# EAGLE board Hifi Nutube DAC (EAGLE 9.6.2)
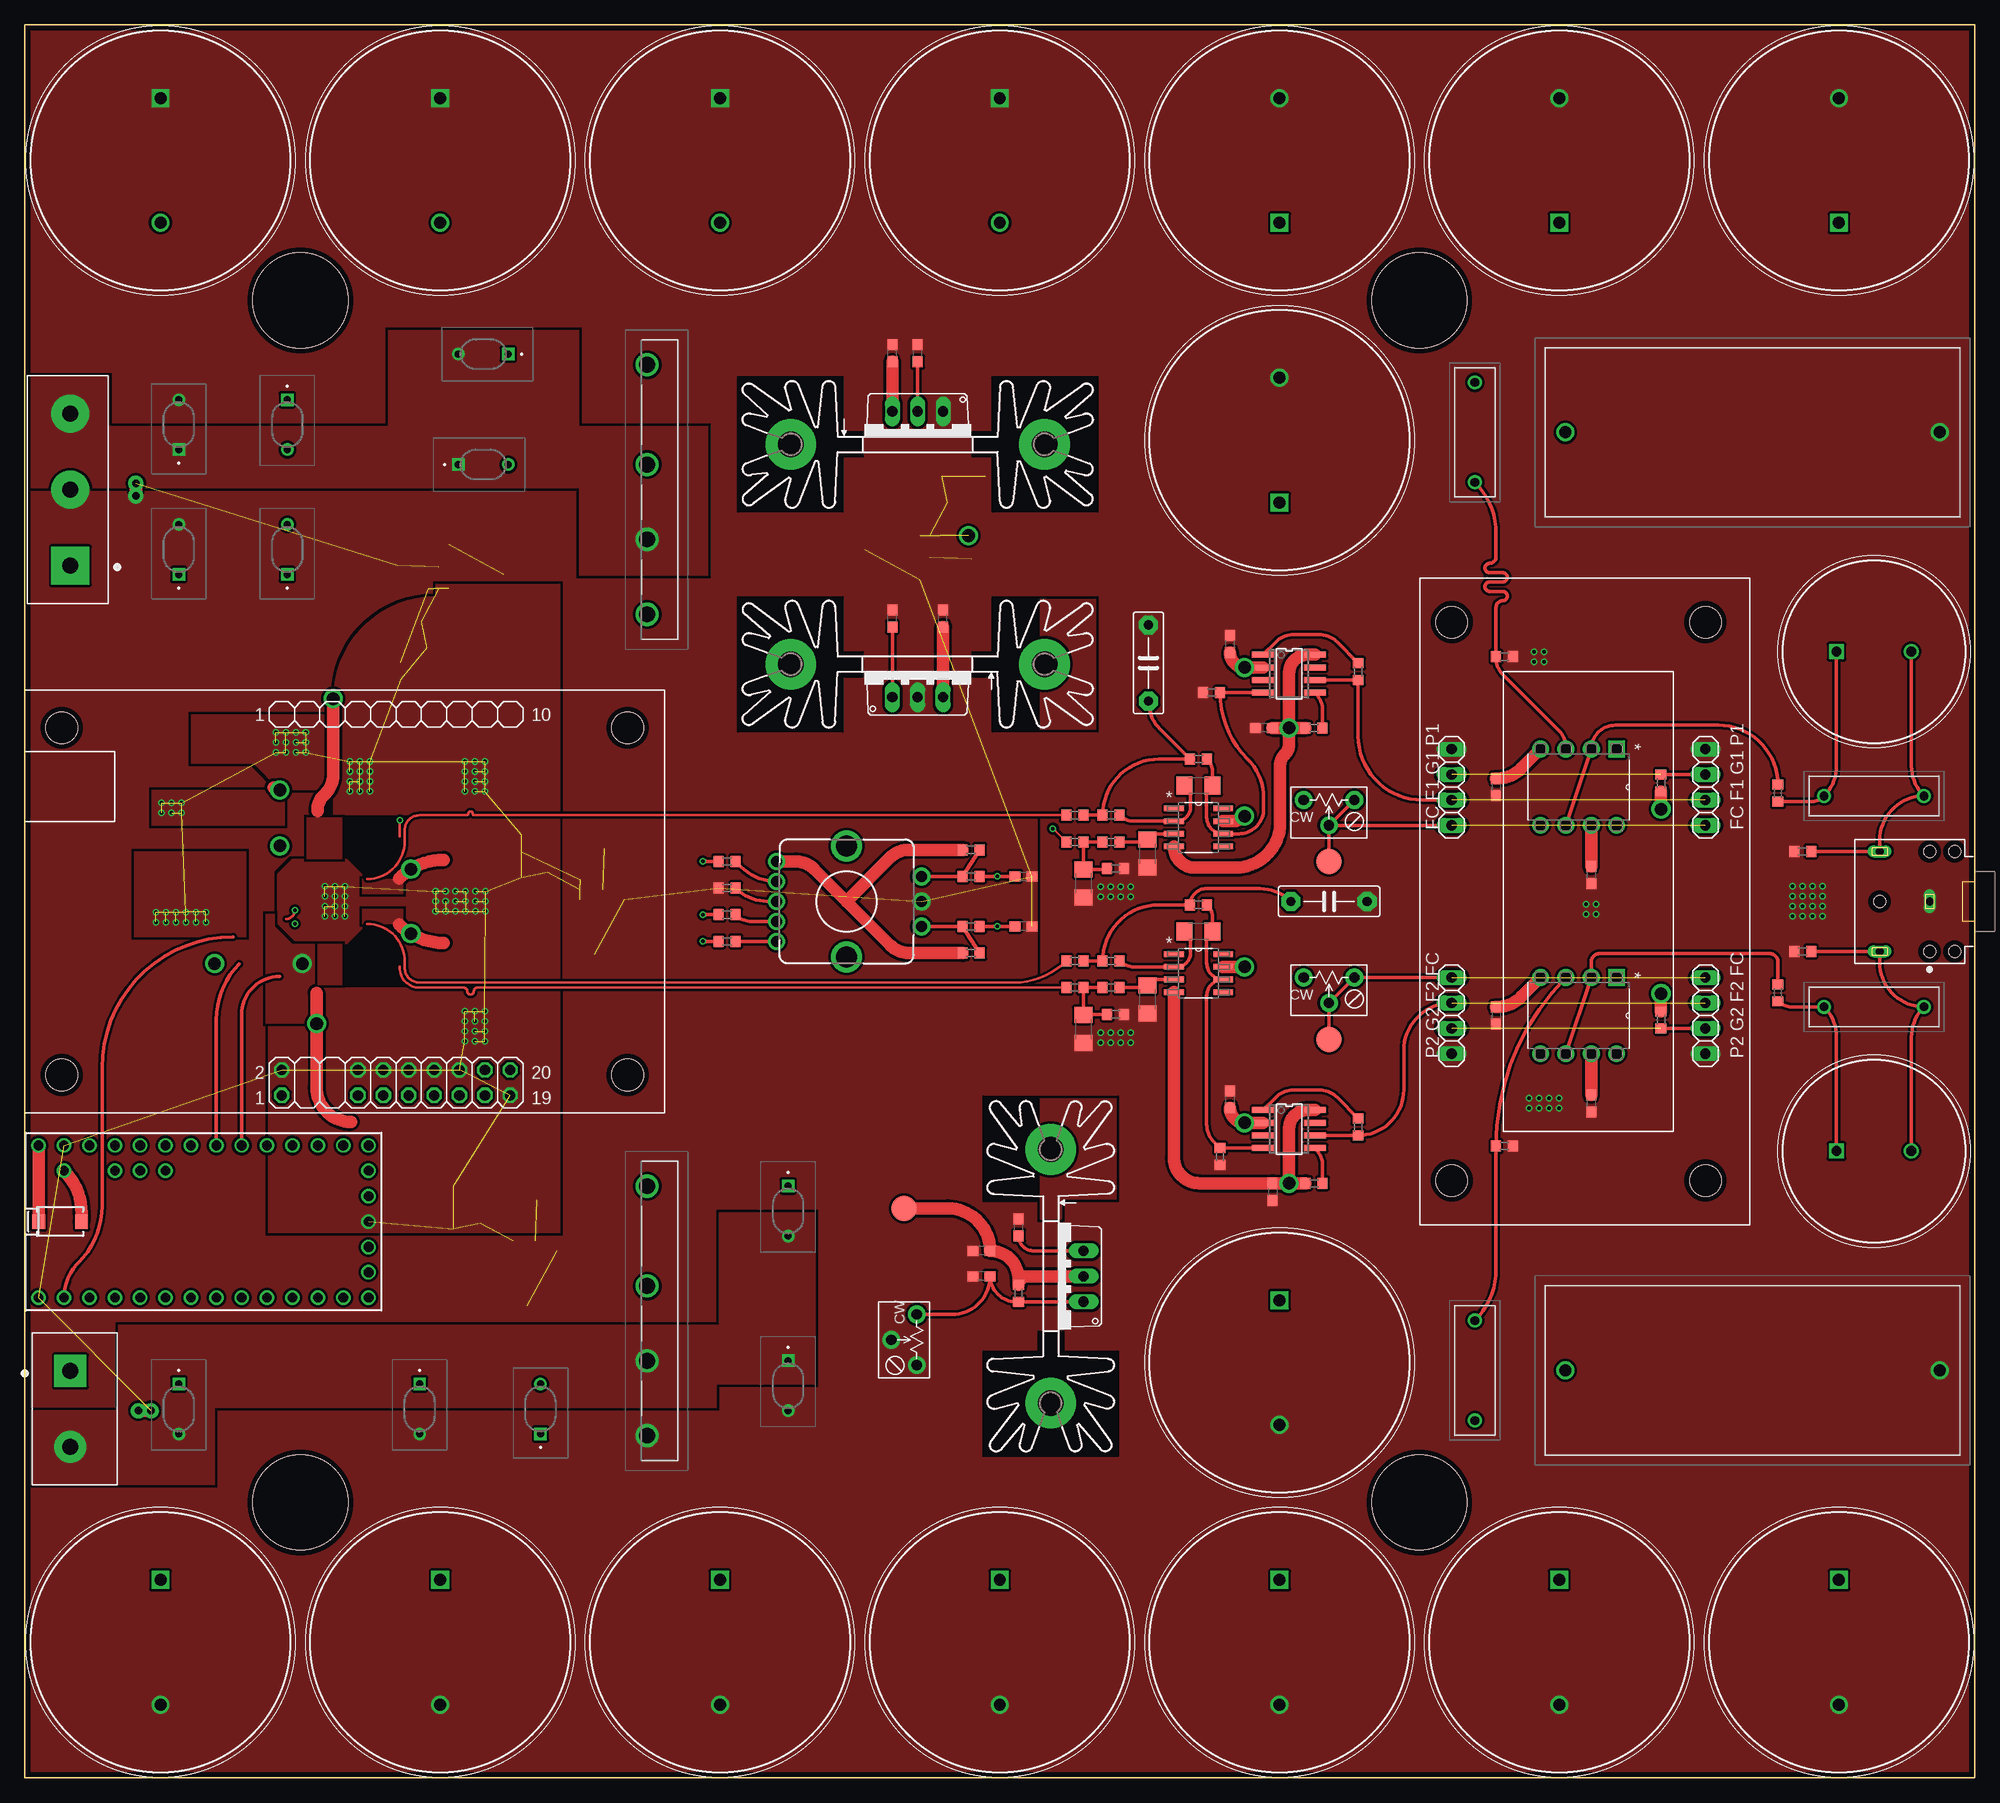
[diagram p0: board, top side]
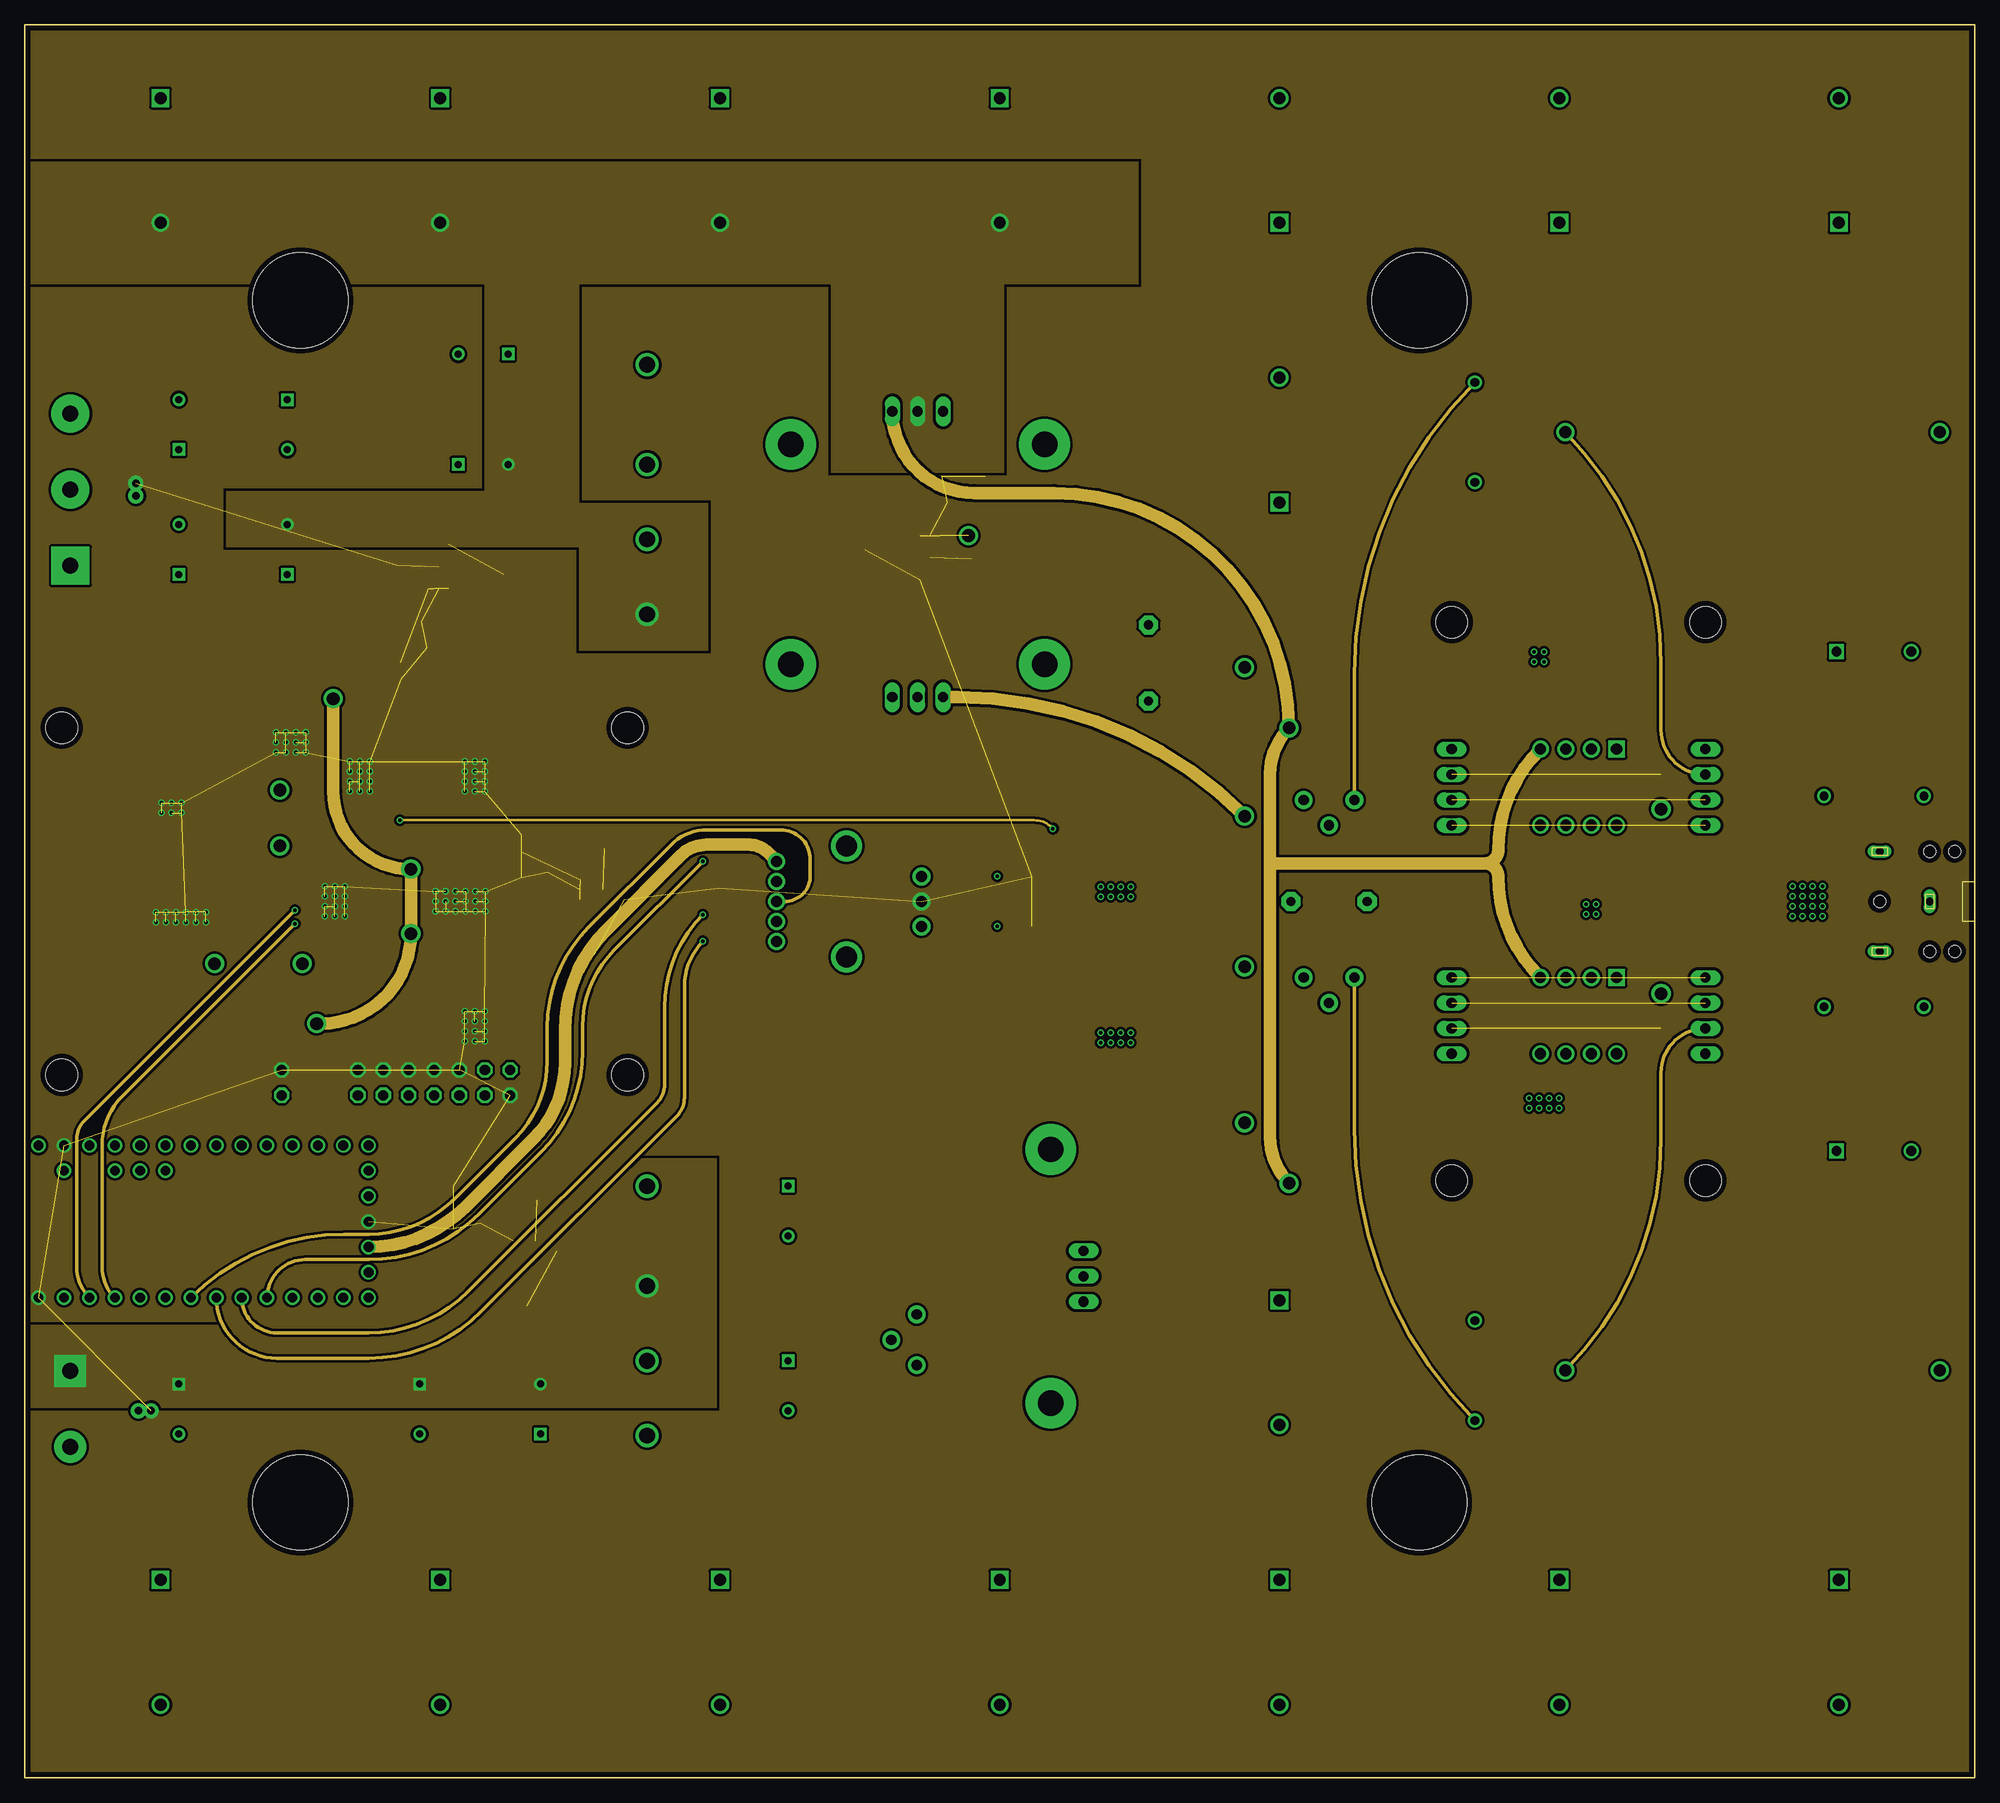
[diagram p1: board, inner layer Route2]
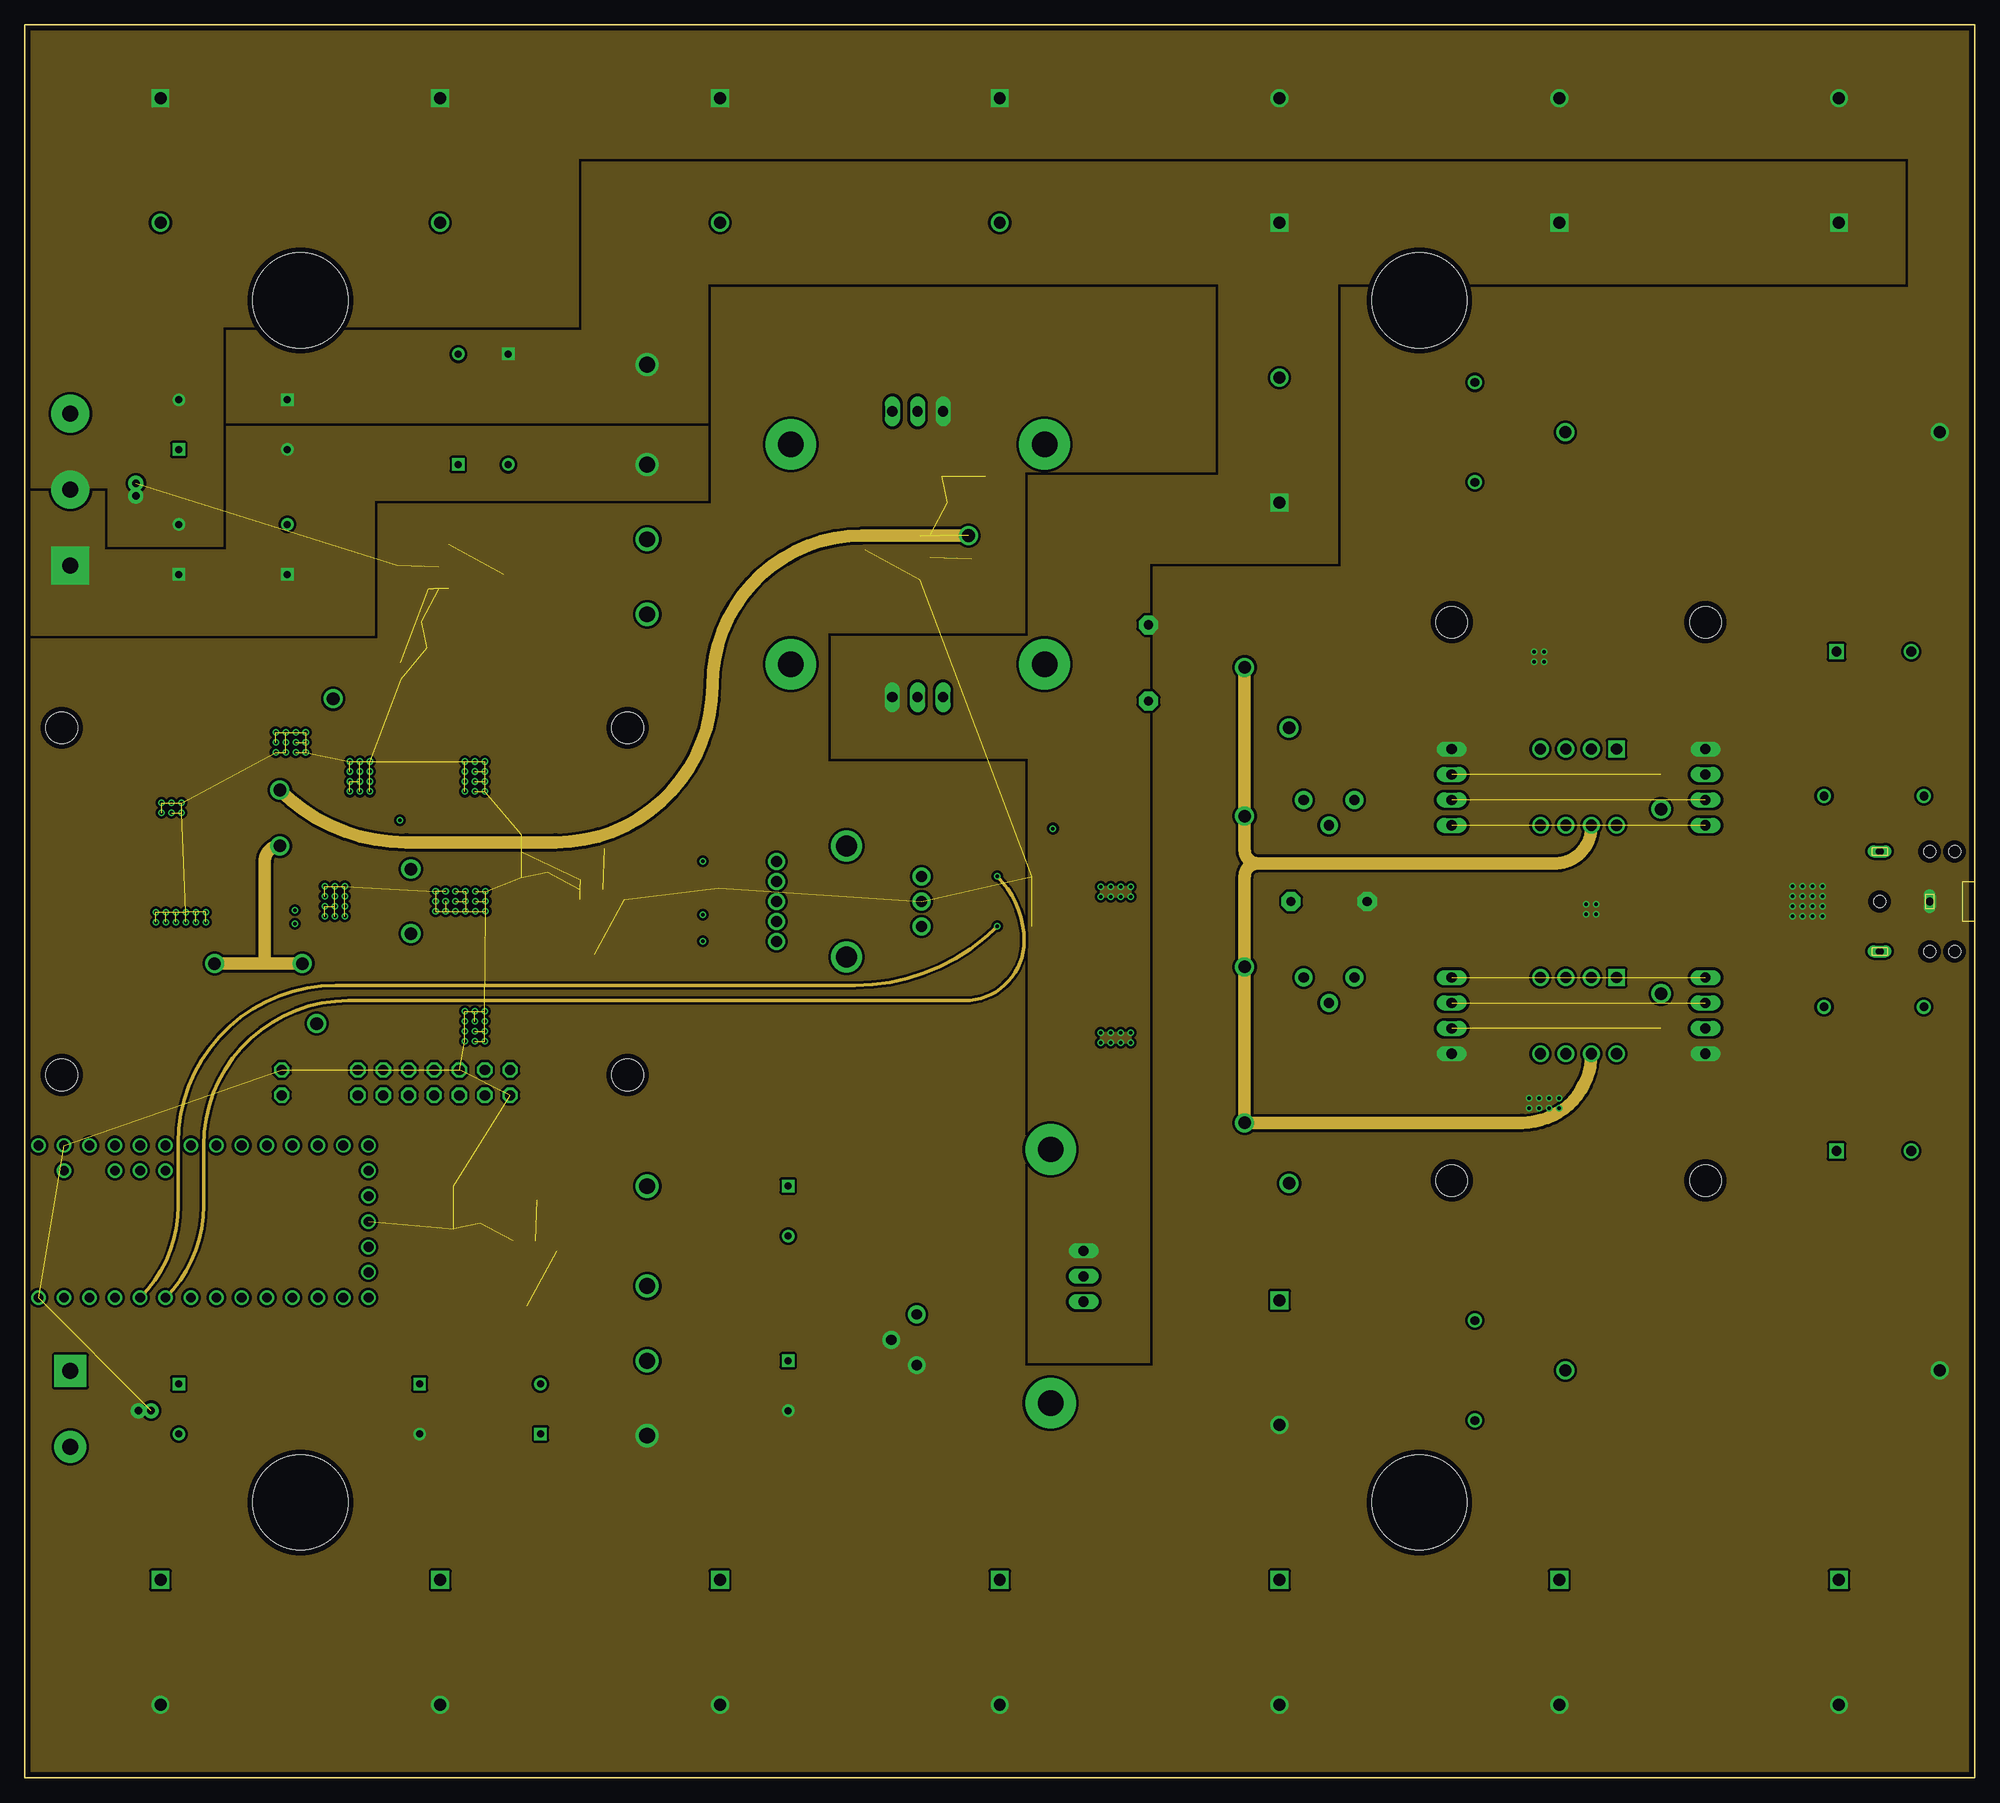
[diagram p2: board, inner layer Route15]
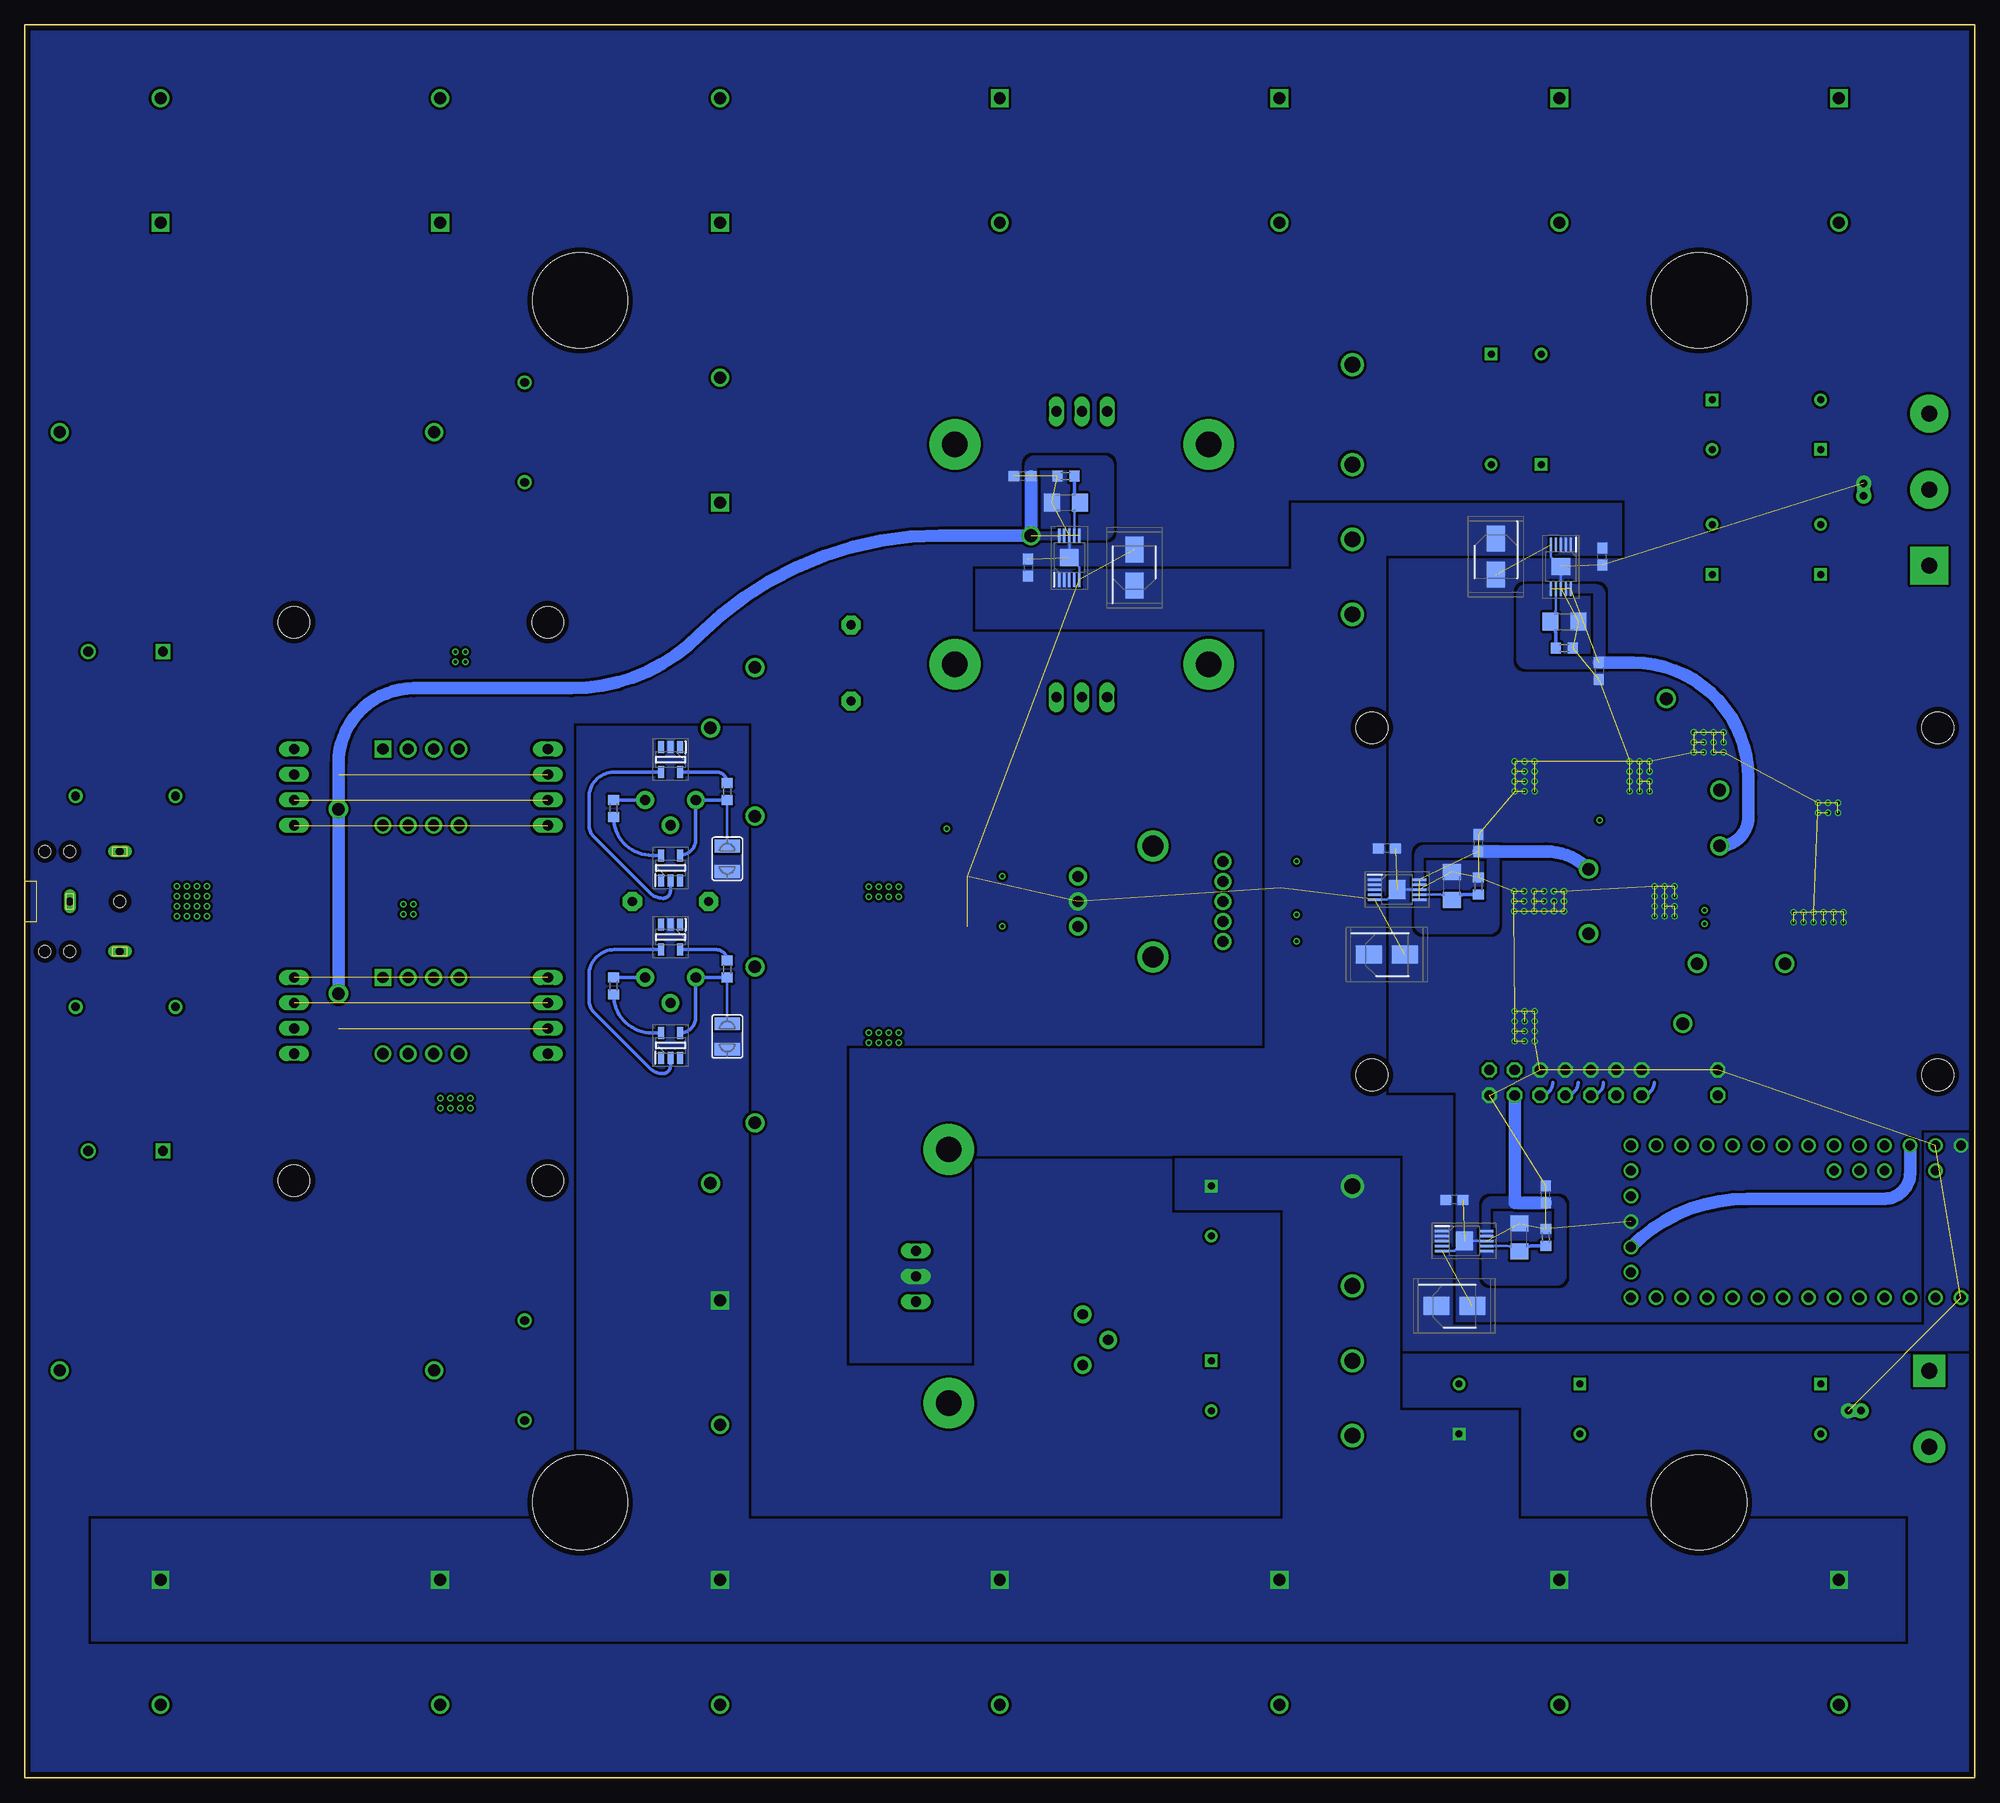
[diagram p3: board, bottom side, seen from below]

Size 195.12 x 175.44 mm. Coordinates in mm from the lower left corner, seen from the top.
Outline: 0,175.44 0,0 195.12,0 195.12,175.44 0,175.44
Copper layers (1*2*15*16): Top 0.035mm / dielectric 0.2mm / Route2 0.035mm / dielectric 1.2mm / Route15 0.035mm / dielectric 0.2mm / Bottom 0.035mm
Design rules "Elecrow_4-layer_PCB_eagle_rule": minimum track width 6mil, minimum drill 12mil, track to track 6mil, track to pad 6mil, pad to pad 6mil, via to via 8mil, smd to smd 0mil, copper to edge 20mil, drill to drill 10mil, minimum pad ring 6mil, minimum via ring 6mil, stop-mask expansion 0mil, vias tented up to drill 100mil, thermal gap 10mil
Net classes: 0 default: width 0.246 mm, drill 0.246 mm, clearance 0.254 mm; 1 diff pairs: width 0.246 mm, drill 0.246 mm, clearance 0.254 mm; 3 Power: width 1.27 mm, drill 1.27 mm, clearance 0.254 mm
Holes 9.53 mm at 27.56,147.88 27.56,27.56 139.56,27.56 139.56,147.88

## Footprints (pad centres in the part's own frame; a part is rotated, then mirrored left to right if it is on the bottom)
GSIB-5S = drill 1.56 pad 2.34: 1 0,0; 2 10,0; 3 17.5,0; 4 25,0
C0603 = smd 1.1 x 1: 1 -0.85,0; 2 0.85,0
CAPAE430X550N = smd 2.6 x 1.8: 1 -1.8,0; 2 1.8,0
FG24 = drill 0.7 pad 1.25 square: 1 0,0 | drill 0.7 pad 1.25: 2 5,0
C1206 = smd 1.6 x 1.8: 1 -1.4,0; 2 1.4,0
CAPPRD1250W100D2600H5200 = drill 1.2 pad 1.8 square: 1 0,0 | drill 1.2 pad 1.8: 2 12.5,0
MKP4D031003C00JSSD = drill 0.86 pad 1.397: 1 0,0; 2 10,0
C7.5B3 = drill 0.914 pad 1.905 octagon: 1 -3.81,0; 2 3.81,0
MKP4D051007E00JSSD = drill 1.2 pad 1.8: 1 0,0; 2 37.5,0
CAPPRD750W80D1825H4150 = drill 1 pad 1.5 square: 1 0,0 | drill 1 pad 1.5: 2 7.5,0
SMA-DIODE = smd 1.27 x 1.47: A -2.15,0; C 2.15,0
I2SOVERUSBV3 = drill 1.016 octagon: H3.1 25.703,1.745; H3.2 25.703,4.285; H3.7 33.322,1.745; H3.8 33.322,4.285; H3.9 35.862,1.745; H3.10 35.862,4.285; H3.11 38.403,1.745; H3.12 38.403,4.285; H3.13 40.943,1.745; H3.14 40.943,4.285; H3.15 43.483,1.745; H3.16 43.483,4.285; H3.17 46.023,1.745; H3.18 46.023,4.285; H3.19 48.562,1.745; H3.20 48.562,4.285 | hole 3.175: 3.688,3.775; 3.688,38.525; 60.312,38.525; 60.312,3.775
TO220V = drill 1.016 long: 1 -2.54,-2.54; 2 0,-2.54; 3 2.54,-2.54
SOP50P490X110-11N = smd 1.425 x 0.246: 1 -2.212,1; 2 -2.212,0.5; 3 -2.212,0; 4 -2.212,-0.5; 5 -2.212,-1; 6 2.212,-1; 7 2.212,-0.5; 8 2.212,0; 9 2.212,0.5; 10 2.212,1 | smd 1.68 x 1.88: 11 0,0
TERMINALBLOCK_PLUGGABLE-3-7.62MM = drill 1.6 pad 3.81 square: 1 -7.62,0 | drill 1.6 pad 3.81: 2 0,0; 3 7.62,0
TERMINALBLOCK_PLUGGABLE-2-7.62MM = drill 1.6 pad 3.2 square: 1 -3.81,0 | drill 1.6 pad 3.2: 2 3.81,0
531XXXXXXXX = drill 2.54 pad 5.08: A2,5 -12.7,-0.762; B2,5 12.7,-0.762
SOT95P280X145-5N = smd 1.2 x 0.6: 1 -1.25,0.95; 2 -1.25,0; 3 -1.25,-0.95; 4 1.25,-0.95; 5 1.25,0.95
SO8 = smd 0.6 x 2.2: 1 -1.905,-2.6; 2 -0.635,-2.6; 3 0.635,-2.6; 4 1.905,-2.6; 5 1.905,2.6; 6 0.635,2.6; 7 -0.635,2.6; 8 -1.905,2.6
R0603 = smd 1 x 1.1: 1 -0.85,0; 2 0.85,0
TRIMPOT_3266 = drill 1.016 pad 1.778: 1 -2.54,-1.27; 2 0,1.27; 3 2.54,-1.27
SHORT_ALL-50 = drill 0.737 pad 1.524: 1 -0.635,0; 2 0.635,0
SJW = smd 1.27 x 2.54: 1 -1.27,0; 2 1.27,0
ENCODER_LED_3_KIT = drill 1.1 pad 1.676: 1 -4,7; 2 -2,7; 3 0,7; 4 2,7; 5 4,7 | drill 1.1 pad 1.8: A -2.5,-7.5; B 2.5,-7.5; C 0,-7.5 | drill 2.1: M1 -5.55,0; M2 5.55,0
B2,54 = smd 2.54 x 2.54: TP 0,0
DIP254P762X508-8 = drill 1.118 square: 1 -7.62,7.62 | drill 1.118: 2 -7.62,5.08; 3 -7.62,2.54; 4 -7.62,0; 5 0,0; 6 0,2.54; 7 0,5.08; 8 0,7.62
SOIC127P600X175-8N = smd 1.981 x 0.559: 1 -2.464,1.905; 2 -2.464,0.635; 3 -2.464,-0.635; 4 -2.464,-1.905; 5 2.464,-1.905; 6 2.464,-0.635; 7 2.464,0.635; 8 2.464,1.905
TEENSY_3.0-3.2&LC_ALL_PINS = drill 0.965: 0 -7.62,13.97; 1 -7.62,11.43; 2 -7.62,8.89; 3 -7.62,6.35; 3.3V 7.62,11.43; 3.3V1 -2.54,-16.51; 4 -7.62,3.81; 5 -7.62,1.27; 6 -7.62,-1.27; 7 -7.62,-3.81; 8 -7.62,-6.35; 9 -7.62,-8.89; 10 -7.62,-11.43; 11 -7.62,-13.97; 12 -7.62,-16.51; 13 7.62,-16.51; 14/A0 7.62,-13.97; 15/A1 7.62,-11.43; 16/A2 7.62,-8.89; 17/A3 7.62,-6.35; 18/A4 7.62,-3.81; 19/A5 7.62,-1.27; 20/A6 7.62,1.27; 21/A7 7.62,3.81; 22/A8 7.62,6.35; 23/A9 7.62,8.89; A10 5.08,6.35; A11 5.08,3.81; AGND 7.62,13.97; AREF 5.08,8.89; GND -7.62,16.51; GND1 0,-16.51; PGM 2.54,-16.51; RESET/DAC 5.08,-16.51; VBAT -5.08,-16.51; VIN 7.62,16.51; VUSB 5.08,13.97
CUI_SJ1-3523N = drill 0.8 long: 1 0,0; 2 5,-5; 3 5,5 | hole 1.2: -2.5,5; 0,5; 5,0; -2.5,-5; 0,-5
NUTUBE_CARRIER = drill 1.016 long: 3 -15.24,25.4; 5 -12.7,25.4; 6 -10.16,25.4; 11 -7.62,25.4; 12 7.62,25.4; 13 10.16,25.4; 15 12.7,25.4; 18 15.24,25.4; 19 -15.24,0; 20 -12.7,0; 21 -10.16,0; 22 -7.62,0; 23 7.62,0; 24 10.16,0; 25 12.7,0; 26 15.24,0 | hole 3.175: -27.94,0; -27.94,25.4; 27.94,25.4; 27.94,0

## Placement (x,y rotation side)
BR1  GSIB2560-E3/45  [GSIB-5S]  62.27,141.44 270 top
BR2  GSIB2560-E3/45  [GSIB-5S]  62.27,59.23 270 top
C14  4.7uF, 35V, X5R or X7R  [C0603]  37.58,110.78 270 bottom
C15  0.1uF, 35V  [C0603]  37.27,122.22 90 bottom
C16  EEE-1VA100WR  [CAPAE430X550N]  47.91,122.22 270 bottom
C17  FG24X7T2E104KNT00  [FG24]  26.25,137.94 270 top
C18  22uF, 35V  [C1206]  41.05,115.73 0 bottom
C19  FG24X7T2E104KNT00  [FG24]  51.59,34.42 90 top
C20  [FG24]  15.4,39.42 270 top
C21  FG24X7T2E104KNT00  [FG24]  26.25,120.44 90 top
C22  FG24X7T2E104KNT00  [FG24]  48.37,142.5 180 top
C23  FG24X7T2E104KNT00  [FG24]  43.37,131.44 0 top
C24  UVY2A332MRD  [CAPPRD1250W100D2600H5200]  125.56,19.81 270 top
C25  FG24X7T2E104KNT00  [FG24]  39.5,39.42 270 top
C26  FG24X7T2E104KNT00  [FG24]  76.39,59.23 270 top
C27  FG24X7T2E104KNT00  [FG24]  76.39,41.73 270 top
C28  UVY2A332MRD  [CAPPRD1250W100D2600H5200]  181.56,19.81 270 top
C29  UVY2A332MRD  [CAPPRD1250W100D2600H5200]  153.56,19.81 270 top
C30  UVY2A332MRD  [CAPPRD1250W100D2600H5200]  125.56,47.81 270 top
C31  UVY2A332MRD  [CAPPRD1250W100D2600H5200]  13.56,168.13 270 top
C32  0.1uF, 35V  [C0603]  147.24,76.29 270 top
C33  [FG24]  15.4,132.94 90 top
C36  UVY2A332MRD  [CAPPRD1250W100D2600H5200]  125.56,155.63 90 top
C37  UVY2A332MRD  [CAPPRD1250W100D2600H5200]  41.56,19.81 270 top
C38*  0.1uF*, 63V  [MKP4D031003C00JSSD]  180.06,98.27 0 top
C39  UVY2A332MRD  [CAPPRD1250W100D2600H5200]  69.56,168.13 270 top
C40  UVY2A332MRD  [CAPPRD1250W100D2600H5200]  41.56,168.13 270 top
C41  UVY2A332MRD  [CAPPRD1250W100D2600H5200]  97.56,168.13 270 top
C42  UVY2A332MRD  [CAPPRD1250W100D2600H5200]  153.56,155.63 90 top
C43  UVY2A332MRD  [CAPPRD1250W100D2600H5200]  125.56,127.63 90 top
C44  UVY2A332MRD  [CAPPRD1250W100D2600H5200]  181.56,155.63 90 top
C45*  4.7nF, 63V*  [C1206]  112.32,77.92 270 top
C46*  0.033uF, 63V*  [C1206]  105.92,74.94 270 top
C48  0.1uF, 35V  [C0603]  120.61,113.45 90 top
C50  0.1uF, 35V  [C0603]  124.02,105.09 180 top
C51*  0.01uF, 63V*  [C7.5B3]  130.52,87.72 0 top
C52*  1500pF, 63V*  [C1206]  117.46,84.71 180 top
C53  [FG24]  15.4,120.44 90 top
C54*  4.7nF, 63V*  [C1206]  112.32,92.5 270 top
C55*  0.033uF, 63V*  [C1206]  105.92,89.52 270 top
C56*  1500pF, 63V*  [C1206]  117.46,99.3 180 top
C57  0.1uF, 35V  [C0603]  147.24,99.15 270 top
C58*  0.01uF, 63V*  [C7.5B3]  112.44,111.59 90 top
C59*  0.1uF*, 63V  [MKP4D031003C00JSSD]  180.06,77.17 0 top
C60  UVY2A332MRD  [CAPPRD1250W100D2600H5200]  13.56,19.81 270 top
C61  UVY2A332MRD  [CAPPRD1250W100D2600H5200]  69.56,19.81 270 top
C62  UVY2A332MRD  [CAPPRD1250W100D2600H5200]  97.56,19.81 270 top
C63  0.33uF, 35V  [C0603]  86.81,116.05 90 top
C64  0.1uF, 35V  [C0603]  156.76,90.38 270 top
C65  0.1uF, 35V  [C0603]  120.61,67.88 90 top
C66  1.0uF, 35V  [C0603]  91.89,116.05 90 top
C67  0.1uF, 35V  [C0603]  124.87,58.66 270 top
C68*  10uF*  [MKP4D051007E00JSSD]  154.16,134.67 0 top
C69  0.1uF, 35V  [C0603]  156.76,67.52 270 top
C70*  10uF*  [MKP4D051007E00JSSD]  154.16,40.77 0 top
C71  0.33uF, 35V  [C0603]  89.34,142.58 90 top
C72  1.0uF, 35V  [C0603]  86.81,142.58 90 top
C73  4.7uF, 35V, X5R or X7R  [C0603]  95.28,130.28 180 bottom
C74  0.1uF, 35V  [C0603]  94.73,121.13 270 bottom
C75  22uF, 35V  [C1206]  90.95,127.62 180 bottom
C76  EEE-1VA100WR  [CAPAE430X550N]  84.09,121.13 90 bottom
C77  4.7uF, 35V, X5R or X7R  [C0603]  49.64,93.58 90 bottom
C78  0.1uF, 35V  [C0603]  58.8,93.03 180 bottom
C79  22uF, 35V  [C1206]  52.3,89.25 90 bottom
C80  EEE-1VA100WR  [CAPAE430X550N]  58.8,82.4 0 bottom
C83  0.01uF (10nF)  [C0603]  99.95,85.22 180 top
C84  0.01uF (10nF)  [C0603]  99.95,90.22 0 top
C85  0.1uF, 35V  [C0603]  99.44,55.1 90 top
C86  1.0uF, 35V, Tantalum  [C0603]  95.75,52.75 180 top
C87  10uF, 35V  [C0603]  95.75,50.2 180 top
C88  4.7uF, 35V, X5R or X7R  [C0603]  42.9,58.41 90 bottom
C89  0.1uF, 35V  [C0603]  52.06,57.87 180 bottom
C90  22uF, 35V  [C1206]  45.57,54.09 90 bottom
C91  EEE-1VA100WR  [CAPAE430X550N]  52.06,47.23 0 bottom
C92*  0.1uF*, 63V  [MKP4D031003C00JSSD]  145.11,35.77 90 top
C93*  0.1uF*, 63V  [MKP4D031003C00JSSD]  145.11,139.67 270 top
C94*  UKZ1H102MHM  [CAPPRD750W80D1825H4150]  181.31,62.73 0 top
C95*  UKZ1H102MHM  [CAPPRD750W80D1825H4150]  181.31,112.71 0 top
D1  SS14-DIODE-SCHOTTKY-SS14  [SMA-DIODE]  3.52,55.67 180 top
I2SOVERUSB  I2SOVERUSBV3  [I2SOVERUSBV3]  0,66.57 0 top
IC1  78TV  [TO220V]  89.34,110.7 0 top
IC2  LT3042EMSE#PBF  [SOP50P490X110-11N]  90.6,122.13 90 bottom
IC3  LT3042EMSE#PBF  [SOP50P490X110-11N]  41.4,121.22 270 bottom
IC4  7918TV  [TO220V]  89.34,134.23 180 top
IC5  LT3042EMSE#PBF  [SOP50P490X110-11N]  57.8,88.9 0 bottom
IC6  LM317T  [TO220V]  103.42,50.2 90 top
IC7  LT3042EMSE#PBF  [SOP50P490X110-11N]  51.06,53.73 0 bottom
JP1  15VAC  [TERMINALBLOCK_PLUGGABLE-3-7.62MM]  4.55,128.94 90 top
JP2  +56VAC  [TERMINALBLOCK_PLUGGABLE-2-7.62MM]  4.55,36.92 270 top
KK1  TO-220/218-531XXXXXXXX  [531XXXXXXXX]  103.42,50.2 270 top
KK2  TO-220/218-531XXXXXXXX  [531XXXXXXXX]  89.34,110.7 180 top
KK3  TO-220/218-531XXXXXXXX  [531XXXXXXXX]  89.34,134.23 0 top
Q1  DN1509K1-G  [SOT95P280X145-5N]  130.52,101.92 270 bottom
Q2  DN1509K1-G  [SOT95P280X145-5N]  130.52,91.08 90 bottom
Q3  LSK389B_SO  [SO8]  126.52,110.51 270 top
Q4  DN1509K1-G  [SOT95P280X145-5N]  130.52,84.14 270 bottom
Q5  DN1509K1-G  [SOT95P280X145-5N]  130.52,73.3 90 bottom
Q6  LSK389B_SO  [SO8]  126.52,64.93 270 top
R1  10  [R0603]  70.27,83.72 180 top
R2  10  [R0603]  70.27,86.39 180 top
R3  10  [R0603]  70.27,91.72 180 top
R4  10k  [R0603]  70.27,89.05 180 top
R5  10k  [R0603]  94.69,82.55 0 top
R6  33.2k, 1%  [R0603]  90.95,130.28 180 bottom
R7  49.9k, 1%  [R0603]  49.64,89.25 90 bottom
R8  33.2k, 1%  [R0603]  41.05,113.07 0 bottom
R9  240, 1%  [R0603]  99.44,48.5 270 top
R11  49.9k, 1%  [R0603]  42.9,54.09 90 bottom
R12  800 (Var)  [TRIMPOT_3266]  87.98,43.85 90 top
R13*  1k*  [R0603]  177.92,92.72 0 top
R14*  1k*  [R0603]  177.92,82.72 0 top
R18  1M*  [R0603]  148.09,112.2 0 top
R19  1M* (Var)  [TRIMPOT_3266]  130.52,96.61 180 top
R20  1M* (Var)  [TRIMPOT_3266]  130.52,78.83 180 top
R21  100*  [R0603]  124.83,98.73 90 bottom
R22  1M*  [R0603]  148.09,63.24 180 top
R23  100*  [R0603]  136.21,97.03 270 bottom
R24  100*  [R0603]  124.83,80.95 90 bottom
R25  100*  [R0603]  136.21,79.25 270 bottom
R29  10k  [R0603]  94.69,92.89 0 top
R30  10k  [R0603]  94.69,85.22 180 top
R31  10k  [R0603]  94.69,90.22 180 top
R32*  1*  [R0603]  175.44,78.58 270 top
R33*  1*  [R0603]  175.44,98.56 270 top
R34*  300*  [R0603]  109.16,76.43 180 top
R35*  300*  [R0603]  105.07,79.09 0 top
R36*  91*  [R0603]  108.71,81.76 180 top
R37*  910*  [R0603]  117.46,87.38 180 top
R38*  300*  [R0603]  109.16,91.01 180 top
R39  1M*  [R0603]  118.76,108.6 0 top
R40  1M*  [R0603]  119.61,62.18 90 top
R42  100*  [R0603]  133.43,65.15 90 top
R43  100*  [R0603]  129.02,59.51 0 top
R44  150*  [R0603]  163.75,99.57 270 top
R45  150*  [R0603]  163.75,75.87 270 top
R46*  910*  [R0603]  105.07,81.76 180 top
R47*  27*  [R0603]  108.71,93.68 180 top
R48  100*  [R0603]  133.43,110.72 90 top
R49  100*  [R0603]  129.02,105.09 0 top
R50*  91*  [R0603]  108.71,96.35 180 top
R51*  910*  [R0603]  117.46,101.97 180 top
R52*  910*  [R0603]  105.07,96.35 180 top
R53*  300*  [R0603]  105.07,93.68 0 top
R54*  27*  [R0603]  108.71,79.09 180 top
SH1  SHORTA5  [SHORT_ALL-50]  11.99,36.74 0 top
SH2  SHORTA5  [SHORT_ALL-50]  11.1,128.94 90 top
SJ1  SJW  [SJW]  124.83,91.98 270 bottom
SJ2  SJW  [SJW]  124.83,74.2 270 bottom
SW1  ENCODER_RGB_CAKIT  [ENCODER_LED_3_KIT]  82.23,87.72 90 top
TP1  2.54MM_TESTPOINTB2,54  [B2,54]  130.52,91.69 90 top
TP2  2.54MM_TESTPOINTB2,54  [B2,54]  130.52,73.91 90 top
TP4  2.54MM_TESTPOINTB2,54  [B2,54]  87.98,57 0 top
U2  OPA604AP  [DIP254P762X508-8]  151.68,95.34 270 top
U3  OPA604AP  [DIP254P762X508-8]  151.68,72.48 270 top
U4  OPA1611AID  [SOIC127P600X175-8N]  117.46,80.54 0 top
U5  OPA1611AID  [SOIC127P600X175-8N]  117.46,95.12 0 top
U$1  TEENSY_LC_ALL_PINS  [TEENSY_3.0-3.2&LC_ALL_PINS]  17.88,55.67 90 top
U$2  SJ1-3523N  [CUI_SJ1-3523N]  190.62,87.72 180 top
VT1  NUTUBE_CARRIER  [NUTUBE_CARRIER]  142.79,87.72 270 top

## Library data of the parts
BR1 BR2 = Hifi Nutube DAC (Next 6) 28; BOM: Yes; DESCRIPTION: VISHAY - GSIB2560-E3/45 - BRIDGE RECTIFIER, SINGLE PHASE, 3.5A, 600V, GSIB-5S; DISTRIBUTOR_PART_NUMBER: 625-GSIB2560-E3; HEIGHT: 30mm; LINK: https://www.mouser.com/ProductDetail/625-GSIB2560-E3; MANUFACTURER_NAME: Vishay; MANUFACTURER_PART_NUMBER: GSIB2560-E3/45
C14 C73 C77 C88 = Hifi Nutube DAC (Next 6) 28; BOM: Yes; DESCRIPTION: Multilayer Ceramic Capacitors MLCC - SMD/SMT 0603 4.7uF 35volts X5R 10%; DISTRIBUTOR_PART_NUMBER: 81-GRM188R6YA475KE5D; HEIGHT: 0.8mm; LINK: https://www.mouser.com/ProductDetail/Murata-Electronics/GRM188R6YA475KE15D?qs=eeBpzGFlv%252B%2FTEUAkSXFIlg%3D%3D; MANUFACTURER_NAME: Murata Electronics; MANUFACTURER_PART_NUMBER: GRM188R6YA475KE15D
C15 C32 C48 C50 C57 C64 C65 C67 C69 C74 C78 C85 C89 = Hifi Nutube DAC (Next 6) 28; BOM: Yes; DESCRIPTION: Multilayer Ceramic Capacitors MLCC - SMD/SMT 0603 35VDC 0.1uF 20% X7R AEC-Q200; DISTRIBUTOR_PART_NUMBER: 963-GMJ107BB7104MAHT; HEIGHT: 1mm; LINK: https://www.mouser.com/ProductDetail/Taiyo-Yuden/GMJ107BB7104MAHT?qs=%2Fha2pyFadujHrlowQtTjdnqfzoSa0Cvv97OkvRNS3sSjPFq524h2H2kGErSK5VOC; MANUFACTURER_NAME: Taiyo Yuden; MANUFACTURER_PART_NUMBER: GMJ107BB7104MAHT
C16 C76 C80 C91 = Hifi Nutube DAC (Next 6) 28; BOM: Yes; DESCRIPTION: Panasonic Aluminium Electrolytic Capacitor 10uF 35V dc 4mm B S(V) Series, Surface Mount Electrolytic, +/-20% 4 x 5.4mm; DISTRIBUTOR_PART_NUMBER: 667-EEE-1VA100WR; HEIGHT: 5.5mm; LINK: https://www.mouser.com/ProductDetail/Panasonic/EEE-1VA100WR?qs=%2Fha2pyFadug8Pl57h5%252BWRycqoj%252BYk%252BwXx38E6gXpvvRzpPae9dJ6UQ%3D%3D; MANUFACTURER_NAME: Panasonic; MANUFACTURER_PART_NUMBER: EEE-1VA100WR
C17 C19 C21-C23 C25-C27 = Hifi Nutube DAC (Next 6) 28; BOM: Yes; DESCRIPTION: MLCC with dipped radial lead; HEIGHT: 5.5mm; MANUFACTURER_NAME: TDK; MANUFACTURER_PART_NUMBER: FG24X7T2E104KNT00
C18 C75 C79 C90 = Hifi Nutube DAC (Next 6) 28; BOM: Yes; DESCRIPTION: Multilayer Ceramic Capacitors MLCC - SMD/SMT 1210 35VDC 22uF 20% X5R; DISTRIBUTOR_PART_NUMBER: 963-GMK325BJ226MM-P; HEIGHT: 2.7mm; LINK: https://www.mouser.com/ProductDetail/Taiyo-Yuden/GMK325BJ226MM-P?qs=Zy5V7Kj3rCUIOEmi54lk%252BQ%3D%3D; MANUFACTURER_NAME: Taiyo Yuden; MANUFACTURER_PART_NUMBER: GMK325BJ226MM-P
C20 C33 C53 = Hifi Nutube DAC (Next 6) 28; BOM: Yes; DESCRIPTION: MLCC with dipped radial lead; HEIGHT: 5.5mm; MANUFACTURER_NAME: TDK; MANUFACTURER_PART_NUMBER: FG24X7R2E103KNT06; MOUSER_PART_NUMBER: 810-FG24X7R2E103KNT6; MOUSER_PRICE-STOCK: https://www.mouser.co.uk/ProductDetail/TDK/FG24X7R2E103KNT06?qs=qf2ddTMq67Wksxml0CB5Nw%3D%3D
C24 C28-C31 C36 C37 C39-C44 C60-C62 = Hifi Nutube DAC (Next 6) 28; BOM: Yes; DESCRIPTION: CAP ALUM 3300UF 20% 100V RADIAL; HEIGHT: 52mm; MANUFACTURER_NAME: Nichicon; MANUFACTURER_PART_NUMBER: UVY2A332MRD
C38* C59* C92* C93* = Hifi Nutube DAC (Next 6) 28; BOM: Yes; DESCRIPTION: Film Capacitors; DISTRIBUTOR_PART_NUMBER: 505-MKP4D031003C00JS; HEIGHT: 9mm; LINK: https://www.mouser.co.uk/ProductDetail/WIMA/MKP4D031003C00JSSD?qs=sJjjjplDs9ueBXe0w9lo%252BA%3D%3D; MANUFACTURER_NAME: WIMA; MANUFACTURER_PART_NUMBER: MKP4D031003C00JSSD
C45* C54* = Hifi Nutube DAC (Next 6) 28; BOM: Yes; DESCRIPTION: Film Capacitors 0.0047uF 100V; DISTRIBUTOR_PART_NUMBER: 598-FCN1206A472J-H3; HEIGHT: 1.5mm; LINK: https://www.mouser.com/ProductDetail/Cornell-Dubilier-CDE/FCN1206A472J-H3?qs=%2Fha2pyFaduhORVfYbZCGmxCqK95db7zSSJWHojgdBI%252BzmFkScQF0nfenN9ZoeiEO; MANUFACTURER_NAME: Cornell Dubilier; MANUFACTURER_PART_NUMBER: FCN1206A472J-H3
C46* C55* = Hifi Nutube DAC (Next 6) 28; BOM: Yes; DESCRIPTION: Film Capacitors 50V 0.033uF 10% AEC-Q200; DISTRIBUTOR_PART_NUMBER: 80-LDECA2330KA0N00; HEIGHT: 1.2mm; LINK: https://www.mouser.com/ProductDetail/KEMET/LDECA2330KA0N00?qs=%2Fha2pyFadugEIyDQa2ENH0AjZxxQDZeJ28kAZuvR%2FC2losCklUdb6g1kt1ueSJBC; MANUFACTURER_NAME: KEMET; MANUFACTURER_PART_NUMBER: LDECA2330KA0N00
C51* C58* Q3 Q6 = Hifi Nutube DAC (Next 6) 28; BOM: Yes
C52* C56* = Hifi Nutube DAC (Next 6) 28; BOM: Yes; DESCRIPTION: Film Capacitors 0.0015uF 100V; DISTRIBUTOR_PART_NUMBER: 598-FCN1206A152J-H2; HEIGHT: 1.1mm; LINK: https://www.mouser.com/ProductDetail/Cornell-Dubilier-CDE/FCN1206A152J-H2?qs=%2Fha2pyFaduhORVfYbZCGm9sZSPI%2Fe%2FXuzEUMvkXHyu6tGyMfSwqf2I4Pf5lTfeGU; MANUFACTURER_NAME: Cornell Dubilier; MANUFACTURER_PART_NUMBER: FCN1206A152J-H2
C63 C71 = Hifi Nutube DAC (Next 6) 28; BOM: Yes; DESCRIPTION: Multilayer Ceramic Capacitors MLCC - SMD/SMT CGA 0603 35V 0.33uF X7R 10% AEC-Q200; DISTRIBUTOR_PART_NUMBER: 810-CGA3E1X7R1V334K; HEIGHT: 0.8mm; LINK: https://www.mouser.com/ProductDetail/TDK/CGA3E1X7R1V334K080AC?qs=NRhsANhppD%2FgLu91x%252B8Y1A%3D%3D; MANUFACTURER_NAME: TDK; MANUFACTURER_PART_NUMBER: CGA3E1X7R1V334K080AC
C66 C72 = Hifi Nutube DAC (Next 6) 28; BOM: Yes; DESCRIPTION: Multilayer Ceramic Capacitors MLCC - SMD/SMT 0603 35VDC 1uF 10% X5R AEC-Q200; DISTRIBUTOR_PART_NUMBER: 963-GMK107BJ105KAHT; HEIGHT: 0.9mm; LINK: https://www.mouser.com/ProductDetail/Taiyo-Yuden/GMK107BJ105KAHT?qs=CNQs48zzdnrkxeUU7LcRVA%3D%3D; MANUFACTURER_NAME: Taiyo Yuden; MANUFACTURER_PART_NUMBER: GMK107BJ105KAHT
C68* C70* = Hifi Nutube DAC (Next 6) 28; BOM: Yes; DESCRIPTION: Film Capacitors 10uF 100 Volts 5%; DISTRIBUTOR_PART_NUMBER: 505-MKP4D051007E00JS; HEIGHT: 29mm; LINK: https://www.mouser.co.uk/ProductDetail/WIMA/MKP4D051007E00JSSD?qs=K1lkoHpmGTrGA8Eiln8cbQ%3D%3D; MANUFACTURER_NAME: WIMA; MANUFACTURER_PART_NUMBER: MKP4D051007E00JSSD
C83 C84 = Hifi Nutube DAC (Next 6) 28; BOM: Yes; DESCRIPTION: Multilayer Ceramic Capacitors MLCC - SMD/SMT WCAP-CSGP 0.01uF 0603 10% 10V MLCC; DISTRIBUTOR_PART_NUMBER: 710-885012206014; HEIGHT: 0.8mm; LINK: https://www.mouser.com/ProductDetail/Wurth-Elektronik/885012206014?qs=0KOYDY2FL2%252BG40IIH78uMA%3D%3D; MANUFACTURER_NAME: Wurth Elektronik; MANUFACTURER_PART_NUMBER: 885012206014
C86 = Hifi Nutube DAC (Next 6) 28; BOM: Yes; DESCRIPTION: Tantalum Capacitors - Polymer 1.0uF 35volts 20% 500mohms maxESR; DISTRIBUTOR_PART_NUMBER: 74-T58W9105M035C0500; HEIGHT: 0.9mm; LINK: https://www.mouser.com/ProductDetail/Vishay-Polytech/T58W9105M035C0500?qs=bxXxiBiblXrw4cUUSs2vIg%3D%3D; MANUFACTURER_NAME: Vishay / Polytech; MANUFACTURER_PART_NUMBER: T58W9105M035C0500
C87 = Hifi Nutube DAC (Next 6) 28; BOM: Yes; DESCRIPTION: Multilayer Ceramic Capacitors MLCC - SMD/SMT 0603 10uF 35volts *Derate Voltage/Temp; DISTRIBUTOR_PART_NUMBER: 81-GRM188R6YA106MA3D; HEIGHT: 0.8mm; LINK: https://www.mouser.com/ProductDetail/Murata-Electronics/GRM188R6YA106MA73D?qs=I53XXhTNm8uKsiF7Obn3Gg%3D%3D; MANUFACTURER_NAME: Murata Electronics; MANUFACTURER_PART_NUMBER: GRM188R6YA106MA73D
C94* C95* = Hifi Nutube DAC (Next 6) 28; BOM: Yes; DESCRIPTION: Aluminum Electrolytic Capacitors - Radial Leaded 50volts 1000uF 105c 18x40 7.5LS; DISTRIBUTOR_PART_NUMBER: 647-UKZ1H102MHM; HEIGHT: 41.5mm; LINK: https://www.mouser.co.uk/ProductDetail/Nichicon/UKZ1H102MHM?qs=kArNe9LFxXlhtsXCcA9QZA%3D%3D; MANUFACTURER_NAME: Nichicon; MANUFACTURER_PART_NUMBER: UKZ1H102MHM
D1 = Hifi Nutube DAC (Next 6) 28; BOM: Yes; DESCRIPTION: Schottky Diodes & Rectifiers PJ/SS14/TR/7"/HF/1.8K/SMA/SKY/SMD/SSM-10AH/SSM10-QI11/PJ///; DISTRIBUTOR_PART_NUMBER: 241-SS14_R1_00001; HEIGHT: 2.44mm; LINK: https://www.mouser.com/ProductDetail/Panjit/SS14_R1_00001?qs=sPbYRqrBIVlid9xBt7d0Dw%3D%3D; MANUFACTURER_NAME: Panjit; MANUFACTURER_PART_NUMBER: SS14_R1_00001
I2SOVERUSB = Hifi Nutube DAC (Next 6) 28; BOM: Yes; DESCRIPTION: Asynchronous audio transfer at sampling rates up to 768 kHz and 32 bit
IC1 = Hifi Nutube DAC (Next 6) 28; BOM: Yes; DESCRIPTION: Positive Voltage Regulator; DISTRIBUTOR_PART_NUMBER: 511-L7818CV; HEIGHT: 19.2mm; MANUFACTURER_NAME: STMicroelectronics; MANUFACTURER_PART_NUMBER: L7818CV
IC2 IC3 IC5 IC7 = Hifi Nutube DAC (Next 6) 28; BOM: Yes; DESCRIPTION: LINEAR TECHNOLOGY - LT3042EMSE#PBF - LDO, ADJ, 0.2A, 0V-15V, MSOP-10; DISTRIBUTOR_PART_NUMBER: 584-LT3042EMSE#PBF; HEIGHT: 1.1mm; LINK: https://www.mouser.co.uk/ProductDetail/Analog-Devices-Linear-Technology/LT3042EMSEPBF?qs=oahfZPh6IAJ3XP16d20ITw%3D%3D; MANUFACTURER_NAME: Linear Technology; MANUFACTURER_PART_NUMBER: LT3042EMSE#PBF
IC4 = Hifi Nutube DAC (Next 6) 28; BOM: Yes; DESCRIPTION: Negative Voltage Regulator; DISTRIBUTOR_PART_NUMBER: 863-MC7918CTG; HEIGHT: 19.2mm; MANUFACTURER_NAME: onsemi; MANUFACTURER_PART_NUMBER: MC7918CTG
IC6 = Hifi Nutube DAC (Next 6) 28; BOM: Yes; DESCRIPTION: Standard Regulator 1.2V to 37V 1.5A STMicroelectronics LM317T, Single Linear Voltage Regulator, 1.5A Adjustable 1.2 37 V, 3-Pin TO-220; DISTRIBUTOR_PART_NUMBER: 511-LM317T; HEIGHT: 4.6mm; MANUFACTURER_NAME: STMicroelectronics; MANUFACTURER_PART_NUMBER: LM317T
JP1 = Hifi Nutube DAC (Next 6) 28; BOM: Yes; DESCRIPTION: 7.62MM CLOSE VERTICAL PCB HEADER WR-TBL; DISTRIBUTOR_PART_NUMBER: 732-2824-ND; MANUFACTURER_NAME: Wurth Electronik
JP2 = Hifi Nutube DAC (Next 6) 28; BOM: Yes; DESCRIPTION: 7.62MM CLOSE VERTICAL PCB HEADER WR-TBL; DISTRIBUTOR_PART_NUMBER: 732-2823-ND; MANUFACTURER_NAME: Wurth Electronik
KK1-KK3 = Hifi Nutube DAC (Next 6) 28; BOM: Yes; DESCRIPTION: HEATSINKS TO-220/218
Q1 Q2 Q4 Q5 = Hifi Nutube DAC (Next 6) 28; BOM: Yes; DESCRIPTION: Trans MOSFET N-CH Si 90V 0.2A 5-Pin SOT-23 T/R; DISTRIBUTOR_PART_NUMBER: 579-DN1509K1-G; HEIGHT: 1.45mm; MANUFACTURER_NAME: Microchip; MANUFACTURER_PART_NUMBER: DN1509K1-G
R1-R3 = Hifi Nutube DAC (Next 6) 28; BOM: Yes; DESCRIPTION: Thick Film Resistors - SMD 10 Ohms 200 mW 0603 1%; DISTRIBUTOR_PART_NUMBER: 603-RC0603FR-7W10RL; HEIGHT: 0.45mm; LINK: https://www.mouser.com/ProductDetail/YAGEO/RC0603FR-7W10RL?qs=sGAEpiMZZMtlubZbdhIBINhe0vL5TjR%2FTE8bL4OlmcM%3D; MANUFACTURER_NAME: YAGEO; MANUFACTURER_PART_NUMBER: RC0603FR-7W10RL
R4 R5 R29-R31 = Hifi Nutube DAC (Next 6) 28; BOM: Yes; DESCRIPTION: Thick Film Resistors - SMD 10K OHM 1% 1/4W TC100; DISTRIBUTOR_PART_NUMBER: 652-CMP0603AFX-1002L; HEIGHT: 0.45mm; LINK: https://www.mouser.com/ProductDetail/Bourns/CMP0603AFX-1002ELF?qs=%2Fha2pyFaduhorRtoKKmEbo5q%2F6upGdOUhUshNcvz2ZoEikVHWlJpryKxivczBxfl; MANUFACTURER_NAME: Bourns; MANUFACTURER_PART_NUMBER: CMP0603AFX-1002ELF
R6 R8 = Hifi Nutube DAC (Next 6) 28; BOM: Yes; DESCRIPTION: Thick Film Resistors - SMD 0603 33.2Kohm 1% Anti-Surge AEC-Q200; DISTRIBUTOR_PART_NUMBER: 667-ERJ-PA3F3322V; HEIGHT: 0.45mm; LINK: https://www.mouser.com/ProductDetail/Panasonic/ERJ-PA3F3322V?qs=BzJM0faLVqXiOmUfpzeWIw%3D%3D; MANUFACTURER_NAME: Panasonic; MANUFACTURER_PART_NUMBER: ERJ-PA3F3322V
R7 R11 = Hifi Nutube DAC (Next 6) 28; BOM: Yes; DESCRIPTION: Thick Film Resistors - SMD 0603 49.9Kohm 1% Anti-Surge AEC-Q200; DISTRIBUTOR_PART_NUMBER: 667-ERJ-PA3F4992V; HEIGHT: 0.45mm; LINK: https://www.mouser.com/ProductDetail/Panasonic/ERJ-PA3F4992V?qs=BzJM0faLVqWfSmbFa8txng%3D%3D; MANUFACTURER_NAME: Panasonic; MANUFACTURER_PART_NUMBER: ERJ-PA3F4992V
R9 = Hifi Nutube DAC (Next 6) 28; BOM: Yes; DESCRIPTION: Thick Film Resistors - SMD 0603 240ohm 1% Anti-Surge AEC-Q200; DISTRIBUTOR_PART_NUMBER: 667-ERJ-PA3F2400V; HEIGHT: 0.45mm; LINK: https://www.mouser.com/ProductDetail/Panasonic/ERJ-PA3F2400V?qs=%2Fha2pyFadujWqMGonbcVXR7mq35FZW%252BQ6LeX9fKgq7UddemERlqnze2MqnC2wsUp; MANUFACTURER_NAME: Panasonic; MANUFACTURER_PART_NUMBER: ERJ-PA3F2400V
R12 R19 R20 = Hifi Nutube DAC (Next 6) 28; BOM: Yes; DESCRIPTION: TRIM POT, 1/4 BOURNS 3266
R13* R14* = Hifi Nutube DAC (Next 6) 28; BOM: Yes; DESCRIPTION: Thick Film Resistors - SMD 0603 1Kohm 1% Anti-Surge AEC-Q200; DISTRIBUTOR_PART_NUMBER: 667-ERJ-PA3F1001V; HEIGHT: 0.45mm; LINK: https://www.mouser.com/ProductDetail/Panasonic/ERJ-PA3F1001V?qs=%2Fha2pyFadujWqMGonbcVXWpx%2FU6%252B66FAhXV1JmAEZGPjthXsc9llFQZIBNUyHLnF; MANUFACTURER_NAME: Panasonic; MANUFACTURER_PART_NUMBER: ERJ-PA3F1001V
R18 R22 R39 R40 = Hifi Nutube DAC (Next 6) 28; BOM: Yes; DESCRIPTION: Thick Film Resistors - SMD 1M OHM 1% 1/4W TC100; DISTRIBUTOR_PART_NUMBER: 652-CMP0603AFX-1004L; HEIGHT: 0.45mm; LINK: https://www.mouser.com/ProductDetail/Bourns/CMP0603AFX-1004ELF?qs=%2Fha2pyFaduhorRtoKKmEbo5q%2F6upGdOUUG%2FOf1KJV0z32o3g29o%2FeIMT1W%2FSHjF0; MANUFACTURER_NAME: Bourns; MANUFACTURER_PART_NUMBER: CMP0603AFX-1004ELF
R21 R23-R25 R42 R43 R48 R49 = Hifi Nutube DAC (Next 6) 28; BOM: Yes; DESCRIPTION: Thick Film Resistors - SMD 0603 100ohm 1% Anti Surge AEC-Q200; DISTRIBUTOR_PART_NUMBER: 755-ESR03EZPF1000; HEIGHT: 0.45mm; LINK: https://www.mouser.com/ProductDetail/ROHM-Semiconductor/ESR03EZPF1000?qs=493kPxzlxfJdLkJZpX4ByA%3D%3D; MANUFACTURER_NAME: ROHM Semiconductor; MANUFACTURER_PART_NUMBER: ESR03EZPF1000
R32* R33* = Hifi Nutube DAC (Next 6) 28; BOM: Yes; DESCRIPTION: Thick Film Resistors - SMD 0603 1ohm 1% Anti Surge AEC-Q200; DISTRIBUTOR_PART_NUMBER: 755-ESR03EZPF1R00; HEIGHT: 0.45mm; LINK: https://www.mouser.com/ProductDetail/ROHM-Semiconductor/ESR03EZPF1R00?qs=%2Fha2pyFaduh9eay%252BsNz7PGNzrDcrKL3hZWraHvdrMk1JVIx2uIeBCVsTnUf%2FHw0o; MANUFACTURER_NAME: ROHM Semiconductor; MANUFACTURER_PART_NUMBER: ESR03EZPF1R00
R34* R35* R38* R53* = Hifi Nutube DAC (Next 6) 28; BOM: Yes; DESCRIPTION: Thick Film Resistors - SMD 0603 300ohm 1% Anti Surge AEC-Q200; DISTRIBUTOR_PART_NUMBER: 755-ESR03EZPF3000; HEIGHT: 0.45mm; LINK: https://www.mouser.com/ProductDetail/ROHM-Semiconductor/ESR03EZPF3000?qs=%2Fha2pyFaduh9eay%252BsNz7PFRefpzKMD9xofWTCPSmhdFs%252BZbv2oFxKRLRaxU5PZdR; MANUFACTURER_NAME: ROHM Semiconductor; MANUFACTURER_PART_NUMBER: ESR03EZPF3000
R36* R50* = Hifi Nutube DAC (Next 6) 28; BOM: Yes; DESCRIPTION: Thick Film Resistors - SMD 0603 91ohm 1% Anti-Surge AEC-Q200; DISTRIBUTOR_PART_NUMBER: 667-ERJ-PA3F91R0V; HEIGHT: 0.45mm; LINK: https://www.mouser.com/ProductDetail/Panasonic/ERJ-PA3F1001V?qs=%2Fha2pyFadujWqMGonbcVXWpx%2FU6%252B66FAhXV1JmAEZGPjthXsc9llFQZIBNUyHLnF; MANUFACTURER_NAME: Panasonic; MANUFACTURER_PART_NUMBER: ERJ-PA3F91R0V
R37* R46* R51* R52* = Hifi Nutube DAC (Next 6) 28; BOM: Yes; DESCRIPTION: Thick Film Resistors - SMD 0603 910ohm 1% Anti Surge AEC-Q200; DISTRIBUTOR_PART_NUMBER: 755-ESR03EZPF9100; HEIGHT: 0.45mm; LINK: https://www.mouser.com/ProductDetail/ROHM-Semiconductor/ESR03EZPF9100?qs=%2Fha2pyFaduh9eay%252BsNz7PCwRLTV5C4umDAX1y3ISJId208aI4l%252BoDAAx8YjFKWfQ; MANUFACTURER_NAME: ROHM Semiconductor; MANUFACTURER_PART_NUMBER: ESR03EZPF9100
R44 R45 = Hifi Nutube DAC (Next 6) 28; BOM: Yes; DESCRIPTION: Thick Film Resistors - SMD 0603 150ohm 1% Anti Surge AEC-Q200; DISTRIBUTOR_PART_NUMBER: 755-ESR03EZPF1500; HEIGHT: 0.45mm; LINK: https://www.mouser.com/ProductDetail/ROHM-Semiconductor/ESR03EZPF1500?qs=493kPxzlxfJnXyruM80Mgw%3D%3D; MANUFACTURER_NAME: ROHM Semiconductor; MANUFACTURER_PART_NUMBER: ESR03EZPF1500
R47* R54* = Hifi Nutube DAC (Next 6) 28; BOM: Yes; DESCRIPTION: Thick Film Resistors - SMD 27 OHM 1% 1/4W TC100; DISTRIBUTOR_PART_NUMBER: 652-CMP0603AFX-27R0L; HEIGHT: 0.45mm; LINK: https://www.mouser.com/ProductDetail/Bourns/CMP0603AFX-27R0ELF?qs=%2Fha2pyFaduhorRtoKKmEbtYBlIaVjUkc4K3wtBqYll71wqKXRZ5A38EveW8IeqhA; MANUFACTURER_NAME: Bourns; MANUFACTURER_PART_NUMBER: CMP0603AFX-27R0ELF
SH1 SH2 = Hifi Nutube DAC (Next 6) 28; BOM: No; DESCRIPTION: Short between two nets
SJ1 SJ2 TP1 TP2 TP4 U$1 = Hifi Nutube DAC (Next 6) 28; BOM: No
SW1 = Hifi Nutube DAC (Next 6) 28; BOM: Yes; DESCRIPTION: Illuminated Rotary Encoder w/ RGB LED and select switch
U2 U3 = Hifi Nutube DAC (Next 6) 28; BOM: Yes; MANUFACTURER_NAME: Texas Instruments; MANUFACTURER_PART_NUMBER: OPA604AP
U4 U5 = Hifi Nutube DAC (Next 6) 28; BOM: Yes; MANUFACTURER_NAME: Texas Instruments; MANUFACTURER_PART_NUMBER: OPA1611AID
U$2 = Hifi Nutube DAC (Next 6) 28; BOM: Yes; DESCRIPTION: 3.5 mm Right-Angle Stereo Jack, 3 Pin PCB Mount, Non-Threaded; MANUFACTURER_NAME: CUI
VT1 = Hifi Nutube DAC (Next 6) 28; BOM: No; DESCRIPTION: Low-voltage triode vacuum tube

## Nets
26/A12/DAC: U$1.RESET/DAC
+3.3V_ANALOG [Power]: C73.1 IC2.6 IC2.9 IC2.10 R44.2 R45.1
+3.3V_DIGITAL [Power]: C14.1 IC3.6 IC3.9 IC3.10
+3V3 [Power]: R5.1 R29.1 SW1.5 U$1.3.3V U$1.3.3V1
+5.5V [Power]: C15.2 C16.1 C74.2 C76.1 C78.2 C80.1 C86.1 C89.2 C91.1 D1.C IC2.1 IC2.2 IC2.3 IC3.1 IC3.2 IC3.3 IC5.1 IC5.2 IC5.3 IC6.2 IC7.1 IC7.2 IC7.3 R9.1 TP4.TP U$1.VIN
+5V [Power]: C77.1 IC5.6 IC5.9 IC5.10
+18V [Power]: C48.1 C64.1 C65.1 C66.1 C69.1 IC1.3 Q3.2 Q6.2 U2.7 U3.7 U4.7 U5.7
-18V [Power]: C32.1 C50.1 C57.1 C67.1 C72.1 IC4.3 Q3.8 Q6.8 R43.1 R49.1 U2.4 U3.4 U4.4 U5.4
AGND [Power]: BR2.4 C24.2 C25.2 C27.2 C28.2 C29.2 C30.2 C31.1 C32.2 C33.2 C36.2 C37.2 C39.1 C40.1 C41.1 C42.2 C43.2 C44.2 C45*.2 C46*.2 C48.2 C50.2 C51*.2 C53.2 C54*.2 C55*.2 C57.2 C58*.2 C60.2 C61.2 C62.2 C63.2 C64.2 C65.2 C66.2 C67.2 C68*.2 C69.2 C70*.2 C71.2 C72.2 C85.2 C86.2 C87.2 IC1.2 IC4.1 JP1.2 R12.1 R12.2 R13*.1 R14*.1 R18.2 R22.1 R34*.1 R38*.1 R39.1 R40.1 SH1.1 SH2.1 U$2.1 VT1.3 VT1.18 VT1.19 VT1.26
AOUTL_N [diff pairs]: R52*.2
AOUTL_P [diff pairs]: R53*.1
AOUTR_N [diff pairs]: R46*.2
AOUTR_P [diff pairs]: R35*.1
AREF: U$1.AREF
BICK: I2SOVERUSB.H3.11
BLU: R3.2 U$1.8
DGND [Power]: C14.2 C15.1 C16.2 C18.2 C73.2 C74.1 C75.2 C76.2 C77.2 C78.1 C79.2 C80.2 C83.1 C84.2 C88.2 C89.1 C90.2 C91.2 I2SOVERUSB.H3.2 I2SOVERUSB.H3.8 I2SOVERUSB.H3.10 I2SOVERUSB.H3.12 I2SOVERUSB.H3.14 I2SOVERUSB.H3.16 I2SOVERUSB.H3.19 IC2.5 IC2.8 IC2.11 IC3.5 IC3.8 IC3.11 IC5.5 IC5.8 IC5.11 IC7.5 IC7.8 IC7.11 R4.2 R6.2 R7.2 R8.2 R11.2 SH1.2 SH2.2 SW1.C U$1.AGND U$1.GND U$1.GND1
DZFL: U$1.1
DZFR: U$1.2
ENCODER_A: C83.2 R30.1 U$1.3
ENCODER_B: C84.1 R31.1 U$1.4
GRN: R2.2 U$1.7
I2SOVERUSB [Power]: C88.1 I2SOVERUSB.H3.17 IC7.6 IC7.9 IC7.10
LRCK: I2SOVERUSB.H3.15
MCLK: I2SOVERUSB.H3.7
N$1: R1.1 SW1.1
N$2: C75.1 IC2.7 R6.1
N$4: R2.1 SW1.2
N$7: R3.1 SW1.4
N$8: C79.1 IC5.7 R7.1
N$9: R29.2 R31.2 SW1.B
N$10: R5.2 R30.2 SW1.A
N$14: C87.1 IC6.1 R9.2 R12.3
N$15: BR1.1 C17.1 C22.1 C36.1 C42.1 C43.1 C44.1 C63.1 C85.1 IC1.1 IC6.3
N$16: C90.1 IC7.7 R11.1
N$17 [Power]: D1.A U$1.VUSB
N$19: C18.1 IC3.7 R8.1
N$21: BR1.2 C17.2 C21.1 C53.1 JP1.1
N$22: BR2.3 C20.2 C26.2 C27.1 JP2.2
N$23: BR2.2 C19.2 C20.1 C25.1 JP2.1
N$24: C68*.1 R44.1 VT1.5 VT1.20
N$25: C70*.1 R45.2 VT1.15 VT1.25
N$27: BR1.4 C21.2 C23.2 C31.2 C39.2 C40.2 C41.2 C71.1 IC4.2
N$28: BR1.3 C22.2 C23.1 C33.1 JP1.3
N$29: C45*.1 R54*.1 U4.3
N$30: C46*.1 R34*.2 R35*.2 R54*.2
N$31: C52*.1 Q6.4 R37*.1 R40.2 U4.6
N$32: C52*.2 R36*.1 U4.2
N$33: C51*.1 R36*.2 R37*.2 R46*.1
N$34: C54*.1 R47*.1 U5.3
N$35: Q1.5 R21.2
N$36: C55*.1 R38*.2 R47*.2 R53*.2
N$37: C56*.1 Q3.4 R39.2 R51*.1 U5.6
N$38: C56*.2 R50*.1 U5.2
N$39: Q2.4 R19.3 R21.1 SJ1.1
N$40: Q2.5 R23.2
N$41: Q1.4 Q2.2
N$43: Q4.5 R24.2
N$44: Q5.4 R20.3 R24.1 SJ2.1
N$45: Q5.5 R25.2
N$46: Q4.4 Q5.2
N$48: C58*.1 R50*.2 R51*.2 R52*.1
N$49: C59*.2 C94*.2 R14*.2 U$2.3
N$50: R32*.1 U3.2 U3.6
N$51: C59*.1 C94*.1 R32*.2
N$52: C38*.1 C95*.1 R33*.2
N$53: C38*.2 C95*.2 R13*.2 U$2.2
N$54: C93*.1 R19.1 R19.2 R23.1 TP1.TP VT1.11 VT1.22
N$55: C92*.1 R20.1 R20.2 R25.1 TP2.TP VT1.12 VT1.23
N$56: Q3.1 R48.2
N$57: Q3.6 R48.1 VT1.6 VT1.21
N$58: Q3.5 R49.2
N$60: Q6.1 R42.2
N$61: Q6.6 R42.1 VT1.13 VT1.24
N$63: R33*.1 U2.2 U2.6
N$65: Q6.5 R43.2
NUTUBE_L: C93*.2 R18.1 U2.3
NUTUBE_R: C92*.2 R22.2 U3.3
PDN: U$1.0
RED: R1.2 U$1.6
SCL: U$1.19/A5
SDA: U$1.18/A4
SDATA: I2SOVERUSB.H3.13
SWITCH: R4.1 SW1.3 U$1.5
VCC [Power]: BR2.1 C19.1 C24.1 C26.1 C28.1 C29.1 C30.1 C37.1 C60.1 C61.1 C62.1 Q1.2 Q4.2 SJ1.2 SJ2.2

## Tracks (layer width: path | path; a pad name or v marks a point on that pad's centre or on a via)
+3.3V_ANALOG  (via drill 1.27)  (3 unrouted)
  Top 1.27: R44.2 v163.75,96.96 | v163.75,78.48 R45.1 | 24.88,99.13 arc45 v25.51,98.86
  Route15 1.27: v94.42,124.34 83.8,124.34 arc90 68.8,109.34 arc-90 53.09,93.63 38.16,93.63 arc-45 v25.51,98.86
  Bottom 1.27: v163.75,78.48 v163.75,96.96 163.75,101.52 arc90 156.21,109.06 140.44,109.06 arc-45 127.65,114.35 arc45 103.54,124.34 v94.42,124.34 C73.1
  pour Bottom (rank 2, no thermals): 95.06,131.36 arc90 94.06,132.36 87.14,132.36 arc90 86.14,131.36 86.14,124.88 arc90 87.14,123.88 94.06,123.88 arc90 95.06,124.88
+3.3V_DIGITAL  (via drill 1.27)  (3 unrouted)
  Top 0.246: v25.51,93.28 arc45 25.55,93.18
  Route15 1.27: v18.97,81.49 24,81.49 | 24,81.49 v27.76,81.49 | v25.51,93.28 arc90 24,91.76 24,81.49
  Bottom 1.27: v25.51,93.28 arc-90 22.64,96.15 22.64,100.09 arc-90 34.18,111.63 C14.1
  pour Bottom (rank 2, no thermals): 36.94,110.99 44.86,110.99 arc90 45.86,111.99 45.86,118.47 arc90 44.86,119.47 37.94,119.47 arc90 36.94,118.47
  pour Top (no thermals): 24.07,75.49 24.07,86.47 25.01,86.47 25.01,85.22 26.76,83.47 29.01,83.47 29.01,75.49
+3V3
  Top 1.27: SW1.5 77.18,91.72 arc-45 78.97,90.98 82.23,87.72 | R29.1 88.45,92.89 arc45 86.65,92.14 82.23,87.72 | R5.1 88.45,82.55 arc-45 86.65,83.3 82.23,87.72
  Route2 1.27: U$1.3.3V1 arc45 44.1,57.16 50.88,63.94 arc45 54.04,71.56 54.04,74.84 arc-45 58.2,84.88 65.66,92.34 arc-45 68.19,93.39 72.51,93.39 arc-45 74.3,92.65 SW1.5
  Bottom 1.27: U$1.3.3V 6.45,60.51 arc90 8.99,57.97 22.73,57.97 arc-45 U$1.3.3V1
+5.5V
  Top 1.27: D1.C U$1.VIN | TP4.TP 92.35,57 arc-90 C86.1 arc-90 99.44,49.91 R9.1 arc-90 100.3,50.2 IC6.2
  pour Bottom (rank 2, no thermals): 58.92,68.29 52.19,68.29 52.19,45.36 5.05,45.36 5.05,64.56 0,64.56 0,42.71 57.28,42.71 57.28,62.25 100.36,62.25 100.36,41.53 112.61,41.53 112.61,73 71,73 71,115 100,115 100,121 68.39,121 68.39,127.56 35.27,127.56 35.27,122.35 58.92,122.35
+5V  (via drill 1.27)  (3 unrouted)
  Top 1.27: 29.19,78.56 v29.19,75.49 29.19,69.09 arc90 32.63,65.66 | 41.92,83.56 arc-31 v38.63,84.49 arc-14 37.45,85.42 | 41.92,91.88 arc31 v38.63,90.95 arc14 37.45,90.02 | 29.29,96.78 29.29,96.85 arc-45 29.9,98.33 30.1,98.54 arc45 30.85,100.33 v30.85,108
  Route2 1.27: v29.19,75.49 29.63,75.49 arc90 v38.63,84.49 v38.63,90.95 arc-90 30.85,98.73 v30.85,108
  Bottom 1.27: C77.1 42.92,92.73 arc45 v38.63,90.95
  pour Bottom (rank 2, no thermals): 47.56,93.36 47.56,85.44 arc90 48.56,84.44 55.04,84.44 arc90 56.04,85.44 56.04,92.36 arc90 55.04,93.36
  pour Top (rank 2, no thermals): 29.01,79.35 29.01,83.47 31.76,83.47 31.76,79.35
  pour Top (rank 2, no thermals): 28.18,91.97 28.18,96.09 31.76,96.09 31.76,91.97
  pour Top (rank 2, no thermals): 37.86,85.47 33.76,85.47 33.76,86.97 37.86,86.97
  pour Top (rank 2, no thermals): 37.86,88.47 33.76,88.47 33.76,89.97 37.86,89.97
+18V  (via drill 1.27)
  Top 1.27: C64.1 U2.7 | C69.1 U3.7 | IC1.3 C66.1 | C48.1 arc90 v122.07,111.14 Q3.2 | C65.1 arc90 v122.07,65.57 Q6.2 | U4.7 v122.07,81.17 | U5.7 120.89,95.76 arc45 v122.07,96.25
  Route2 1.27: IC1.3 93.33,108.16 arc-45 v122.07,96.25
  Route15 1.27: U2.7 arc-90 153.28,91.53 123.39,91.53 | v122.07,111.14 v122.07,96.25 122.07,92.85 arc90 123.39,91.53 | 123.39,91.53 arc90 122.07,90.21 v122.07,81.17 v122.07,65.57 149.85,65.57 arc90 U3.7
-18V  (via drill 1.27)
  Top 1.27: C50.1 v126.52,105.09 | v126.52,105.09 R49.1 | Q3.8 128.33,112.41 arc90 126.52,110.6 v126.52,105.09 | v126.52,59.51 C67.1 117.53,59.51 arc-90 115,62.05 U4.4 | v126.52,59.51 R43.1 | v126.52,59.51 126.52,65.03 arc-90 128.33,66.84 Q6.8 | IC4.3 C72.1 | C57.1 arc45 149.77,101.05 U2.4 | C32.1 arc45 149.77,78.19 U3.4 | U5.4 arc90 117.12,91.09 121.15,91.09 arc90 125.61,95.55 125.61,101.25 arc-45 126.1,102.45 arc45 126.52,103.46 v126.52,105.09
  Route2 1.27: U2.4 151.61,102.89 arc45 147.46,92.85 arc-90 146.13,91.53 | U3.4 151.61,80.17 arc-45 147.46,90.21 arc90 146.13,91.53 | v126.52,59.51 arc-45 124.62,64.1 124.62,91.53 | 124.62,91.53 124.62,100.5 arc-45 v126.52,105.09 arc90 103.01,128.6 94.97,128.6 arc-90 IC4.3 | 124.62,91.53 146.13,91.53
AGND  (via drill 0.35)
  other vias: 107.67,88.18 107.67,89.18 108.67,88.18 108.67,89.18 109.67,88.18 109.67,89.18 110.67,88.18 110.67,89.18 107.67,73.59 107.67,74.59 108.67,73.59 108.67,74.59 109.67,73.59 109.67,74.59 110.67,73.59 110.67,74.59 152.04,111.7 151.04,111.7 152.04,112.7 151.04,112.7 150.53,67.02 150.53,68.02 151.53,67.02 151.53,68.02 152.53,67.02 152.53,68.02 153.53,67.02 153.53,68.02 157.26,87.42 157.26,86.42 156.26,87.42 156.26,86.42 177.92,86.22 176.92,86.22 177.92,87.22 176.92,87.22 177.92,88.22 176.92,88.22 177.92,89.22 176.92,89.22 179.92,86.22 178.92,86.22 179.92,87.22 178.92,87.22 179.92,88.22 178.92,88.22 179.92,89.22 178.92,89.22
  pour Top (rank 6, no thermals): 0,175.44 195.12,175.44 195.12,0 0,0
  pour Route15 (rank 6, no thermals): 0,175.44 195.12,175.44 195.12,0 0,0
  pour Top (no thermals): 101.86,119.92 101.86,55.52 194.87,55.52 194.87,119.92
AGND2
  pour Top (rank 2, no thermals): 101.6,120.17 101.6,55.27 195.22,55.27 195.22,120.17
AOUTL_N
  Top 0.246: R52*.2 44.97,96.35 arc-90 44.81,96.5 arc180 44.38,96.5 arc-90 44.22,96.35 39.48,96.35 arc90 38.01,94.87 38.01,93.73 arc-90 34.25,89.97
AOUTL_P  (via drill 0.35)
  Top 0.246: R53*.1 v102.88,95.01 | v37.51,95.85 37.51,94.21
  Route2 0.246: v102.88,95.01 102.8,95.1 arc45 101,95.85 v37.51,95.85
AOUTR_N
  Top 0.246: 34.25,85.47 arc-90 38.01,81.71 38.01,81.07 arc90 39.48,79.59 98.99,79.59 arc45 R46*.2
AOUTR_P
  Top 0.246: 37.51,81.23 37.51,81.07 arc90 39.48,79.09 43.9,79.09 arc-90 44.27,78.73 arc180 44.92,78.73 arc-90 45.29,79.09 R35*.1
BICK
  Bottom 0.33: 37.13,69.58 arc90 I2SOVERUSB.H3.11
BLU  (via drill 0.35)
  Top 0.33: v67.85,91.72 R3.2
  Route2 0.33: U$1.8 arc-90 28.04,51.87 34.39,51.87 arc45 45.44,56.44 51.66,62.66 arc45 55.81,72.7 55.81,75.22 arc-45 58.97,82.84 v67.85,91.72
DGND  (via drill 0.35)  (135 unrouted)
  Bottom 0.246: IC7.5 52.06,52.73 IC7.11 IC7.8 | IC5.8 IC5.11 58.8,87.9 IC5.5 | IC3.5 42.4,122.22 IC3.11 IC3.8 | IC2.5 89.6,121.13 IC2.11 IC2.8
  other vias: 30,89.22 31,89.22 32,89.22 30,88.22 31,88.22 32,88.22 30,87.22 31,87.22 32,87.22 30,86.22 31,86.22 32,86.22 14.66,97.59 13.66,97.59 13.66,96.59 14.66,96.59 15.66,96.59 15.66,97.59 25.09,102.64 25.09,103.64 25.09,104.64 26.09,102.64 26.09,103.64 26.09,104.64 27.09,102.64 27.09,103.64 27.09,104.64 28.09,102.64 28.09,103.64 28.09,104.64 32.51,101.72 33.51,101.72 34.51,101.72 32.51,100.72 33.51,100.72 34.51,100.72 32.51,99.72 33.51,99.72 34.51,99.72 32.51,98.72 33.51,98.72 34.51,98.72 13.1,85.64 13.1,86.64 14.1,85.64 14.1,86.64 15.1,85.64 15.1,86.64 16.09,85.64 16.09,86.64 17.09,85.64 17.09,86.64 18.09,85.64 18.09,86.64 41.1,86.72 41.1,87.72 41.1,88.72 42.1,86.72 42.1,87.72 42.1,88.72 43.1,86.72 43.1,87.72 43.1,88.72 44.1,86.72 44.1,87.72 44.1,88.72 45.1,86.72 45.1,87.72 45.1,88.72 46.1,86.72 46.1,87.72 46.1,88.72 44.01,101.72 45.01,101.72 46.01,101.72 44.01,100.72 45.01,100.72 46.01,100.72 44.01,99.72 45.01,99.72 46.01,99.72 44.01,98.72 45.01,98.72 46.01,98.72 44.01,76.72 45.01,76.72 46.01,76.72 44.01,75.72 45.01,75.72 46.01,75.72 44.01,74.72 45.01,74.72 46.01,74.72 44.01,73.72 45.01,73.72 46.01,73.72
  pour Route2 (rank 6, no thermals): 0,175.44 195.12,175.44 195.12,0 0,0
  pour Bottom (rank 6, no thermals): 0,175.44 195.12,175.44 195.12,0 0,0
  pour Top (rank 3, no thermals): 25.26,90.47 26.76,91.97 32.26,91.97 33.76,90.47 33.76,88.64 38.01,88.64 38.01,96.35 53.57,96.35 53.57,79.58 38.01,79.58 38.01,86.8 33.76,86.8 33.76,84.97 32.26,83.47 26.76,83.47 25.26,84.97
  pour Top (rank 3, no thermals): 53.57,79.09 53.57,54.53 24.36,54.53 24.36,79.09
  pour Top (rank 3, no thermals): 53.57,96.35 30.85,96.35 30.85,108 arc-90 41.12,118.27 41.12,119.48 53.57,119.48
  pour Top (rank 3, no thermals): 30.85,98.87 26.02,98.87 25.51,98.87 22.87,101.51 16.66,101.51 16.66,106.41 30.85,106.41
  pour Top (rank 2, no thermals): 26.02,95.31 12.66,95.31 12.66,98.87 26.02,98.87
  pour Top (rank 2, no thermals): 10.92,84.16 10.92,92.72 22.15,92.72 22.15,84.16
  pour Bottom (no thermals): 49.09,91.84 49.09,85.97 54.87,85.97 54.87,91.84
  pour Bottom (no thermals): 42.35,56.67 42.35,50.8 48.13,50.8 48.13,56.67
  pour Bottom (no thermals): 38.46,112.52 44.34,112.52 44.34,118.3 38.46,118.3
  pour Bottom (no thermals): 93.54,130.83 87.66,130.83 87.66,125.05 93.54,125.05
  pour Top (no thermals): 53.82,96.35 53.82,79.59 101.35,79.59 101.35,96.35
DZFL  (via drill 0.35)
  Top 0.246: v27,86.83 arc-90 26.14,85.97
  Route2 0.33: v27,86.83 5.92,65.76 arc45 5.18,63.96 5.18,51.12 arc45 U$1.1
DZFR  (via drill 0.35)
  Route2 0.33: v27,85.47 9.71,68.18 arc45 7.72,63.3 7.72,51.12 arc45 U$1.2
ENCODER_A  (via drill 0.35)
  Top 0.33: R30.1 v97.32,85.22 C83.2
  Route15 0.33: U$1.3 arc45 15.34,57.25 15.34,63.55 arc-90 31.12,79.33 83.09,79.33 arc45 v97.32,85.22
ENCODER_B  (via drill 0.35)
  Top 0.33: C84.1 v97.32,90.22 R31.1
  Route15 0.33: U$1.4 arc45 17.88,57.25 17.88,63.3 arc-90 32.37,77.78 94.04,77.78 arc90 100,83.75 arc45 v97.32,90.22
GRN  (via drill 0.35)
  Top 0.33: v67.85,86.39 R2.2
  Route2 0.33: v67.85,86.39 arc45 64,77.09 64,69.37 arc-45 63.26,67.57 44.36,48.67 arc-45 34.39,44.55 25.2,44.55 arc-90 U$1.7
I2SOVERUSB
  Bottom 1.27: C88.1 46.02,57.56 I2SOVERUSB.H3.17
  pour Bottom (rank 2, no thermals): 41.83,58.2 arc90 40.83,57.2 40.83,50.27 arc90 41.83,49.27 48.31,49.27 arc90 49.31,50.27 49.31,57.2 arc90 48.31,58.2
LRCK
  Bottom 0.33: 42.21,69.58 arc90 I2SOVERUSB.H3.15
MCLK
  Bottom 0.33: 32.05,69.58 arc90 I2SOVERUSB.H3.7
N$1
  Top 0.33: R1.1 SW1.1
N$2
  Bottom 0.246: IC2.7 90.1,126.29 arc45 C75.1
  Bottom 0.33: R6.1 90.1,128.94 arc-45 C75.1
N$4
  Top 0.33: R2.1 arc45 72.73,85.72 SW1.2
N$7
  Top 0.33: R3.1 71.63,91.21 arc45 SW1.4
N$8
  Bottom 0.246: C79.1 arc-45 53.63,88.4 IC5.7
  Bottom 0.33: R7.1 50.98,88.4 arc-45 C79.1
N$9
  Top 0.33: R29.2 R31.2 SW1.B
N$10
  Top 0.33: R5.2 R30.2 SW1.A
N$14
  Top 0.33: R12.3 92.78,46.39 arc90 C87.1 arc90 99.15,47.65 R9.2 IC6.1
N$15
  Top 0.33: C85.1 arc90 100.94,52.75 100.94,52.74 IC6.3 | C63.1 IC1.1
  pour Route15 (no thermals): 20.13,135.57 68.39,135.57 68.39,149.51 119.44,149.51 119.44,130.39 100.36,130.39 100.36,114.28 80.68,114.28 80.68,102.03 100.36,102.03 100.36,41.53 112.61,41.53 112.61,121.51 131.43,121.51 131.43,149.51 188.21,149.51 188.21,161.75 55.7,161.75 55.7,144.87 20.13,144.87
N$16
  Bottom 0.246: IC7.7 46.9,53.23 arc45 C90.1
  Bottom 0.33: R11.1 44.24,53.23 arc-45 C90.1
N$17
  Top 1.27: U$1.VUSB arc-45 5.67,56.51 D1.A
N$19
  Bottom 0.246: IC3.7 41.9,117.06 arc45 C18.1
  Bottom 0.33: R8.1 41.9,114.41 arc-45 C18.1
N$21
  pour Route15 (rank 3, no thermals): 0,114.32 35.02,114.32 35.02,127.82 68.39,127.82 68.39,135.31 20.13,135.31 20.13,122.94 8,122.94 8,128.81 0,128.81
N$22
  pour Top (no thermals): 0,36.79 0,29.32 19,29.32 19,37.05 69.2,37.05 69.2,39.36 79.1,39.36 79.1,56.61 69.46,56.61 69.46,45.36 9.35,45.36 9.35,36.79
N$23
  pour Route2 (no thermals): 69.2,62 61,62 44.36,45.36 0,45.36 0,37.05 69.2,37.05
N$24  (1 unrouted)
  Top 0.33: VT1.5 R44.1
  Route2 0.33: VT1.5 arc-90 163.75,104.86 163.75,111.53 arc45 C68*.1
N$25  (1 unrouted)
  Top 0.33: VT1.15 R45.2
  Route2 0.33: VT1.15 arc90 163.75,70.58 163.75,63.91 arc-45 C70*.1
N$27
  Top 0.33: C71.1 IC4.2
  pour Route2 (no thermals): 0,149.51 45.99,149.51 45.99,128.81 20.13,128.81 20.13,123.19 55.44,123.19 55.44,112.82 68.39,112.82 68.39,127.56 55.44,127.56 55.44,149.51 80.68,149.51 80.68,130.65 98.01,130.65 98.01,149.51 111.43,149.51 111.43,161.75 0,161.75
N$28
  pour Top (no thermals): 0,129.06 55.44,129.06 55.44,120.32 68.39,120.32 68.39,135.31 55.44,135.31 55.44,144.87 36.36,144.87 36.36,135.31 8.45,135.31 8.45,140.34 0,140.34
N$29
  Top 0.33: R54*.1 112.1,79.09 arc90 C45*.1 arc-90 112.91,79.9 U4.3
N$30
  Top 0.33: R54*.2 R35*.2 105.92,76.43 | C46*.1 105.92,76.43 | 105.92,76.43 R34*.2
N$31
  Top 0.33: Q6.4 R40.2 119.02,63.62 arc-45 118.27,65.42 118.27,78.25 arc-90 U4.6 arc-90 118.27,81.56 118.27,84.13 arc-90 C52*.1 118.86,86.05 arc45 R37*.1
N$32
  Top 0.33: R36*.1 arc45 110.98,81.17 U4.2 115.29,81.17 arc90 116.65,82.53 116.65,84.13 arc90 C52*.2
N$33
  Top 0.33: R46*.1 R36*.2 arc-90 113.48,87.38 R37*.2 arc-90 118.23,89 123.62,89 arc-45 C51*.1
N$34
  Top 0.33: R47*.1 112.1,93.68 arc90 C54*.1 arc-90 112.91,94.49 U5.3
N$35
  Bottom 0.33: R21.2 arc-90 125.92,100.67 Q1.5
N$36
  Top 0.33: R47*.2 R53*.2 C55*.1 108.31,90.92 R38*.2
N$37
  Top 0.33: Q3.4 R39.2 arc45 122.36,101.96 arc-45 123.97,98.07 123.97,96.97 arc-90 121.49,94.49 U5.6 arc-90 118.27,96.14 118.27,98.71 arc-90 C56*.1 118.86,100.64 arc45 R51*.1
N$38
  Top 0.33: R50*.1 arc45 110.98,95.76 U5.2 115.29,95.76 arc90 116.65,97.12 116.65,98.71 arc90 C56*.2
N$39
  Bottom 0.246: R21.1 SJ1.1
  Bottom 0.33: R21.1 R19.3 127.98,93.92 arc90 Q2.4
N$40
  Bottom 0.33: Q2.5 132.37,92.33 arc90 R23.2
N$41
  Bottom 0.33: Q1.4 136.14,100.67 arc-90 138.68,98.12 138.68,95.43 arc-45 138.15,94.15 132.56,88.56 arc-45 131.28,88.03 arc-90 130.52,88.79 Q2.2
N$43
  Bottom 0.33: R24.2 arc-90 125.92,82.89 Q4.5
N$44
  Bottom 0.246: R24.1 SJ2.1
  Bottom 0.33: R24.1 R20.3 127.98,76.14 arc90 Q5.4
N$45
  Bottom 0.33: Q5.5 132.37,74.55 arc90 R25.2
N$46
  Bottom 0.33: Q4.4 136.14,82.89 arc-90 138.68,80.34 138.68,77.89 arc-45 138.15,76.61 132.56,71.02 arc-45 131.28,70.49 arc-90 130.52,71.25 Q5.2
N$48
  Top 0.33: R52*.1 R50*.2 arc-90 113.48,101.97 R51*.2 113.61,104.97 arc-45 C58*.1
N$49
  Top 0.33: R14*.2 U$2.3 185.62,81.61 arc90 C59*.2 arc45 188.81,74.15 C94*.2
N$50
  Top 0.33: U3.6 U3.2 156.76,81.69 arc-90 157.56,82.49 174.64,82.49 arc-90 175.44,81.69 R32*.1
N$51
  Top 0.33: C94*.1 181.31,74.15 arc45 C59*.1 176.79,77.17 arc-45 R32*.2
N$52
  Top 0.33: C95*.1 181.31,101.29 arc-45 C38*.1 arc-45 178.71,97.71 R33*.2
N$53
  Top 0.33: R13*.2 U$2.2 185.62,93.83 arc-90 C38*.2 arc-45 188.81,101.29 C95*.2
N$54  (1 unrouted)
  Top 0.33: R19.1 R19.2 | VT1.22 R19.2 | TP1.TP R19.2
  Route2 0.33: C93*.1 arc45 133.06,110.58 R19.1
  Bottom 0.33: R19.1 R23.1
N$55  (1 unrouted)
  Top 0.33: VT1.23 R20.1 R20.2 TP2.TP
  Route2 0.33: C92*.1 arc-45 133.06,64.86 R20.1
  Bottom 0.33: R20.1 R25.1
N$56
  Top 0.33: Q3.1 125.18,113.67 arc-45 126.98,114.42 129.53,114.42 arc-45 131.33,113.67 R48.2
N$57  (1 unrouted)
  Top 0.33: Q3.6 R48.1 133.43,104.28 arc90 139.84,97.88 VT1.21
N$58
  Top 0.33: Q3.5 arc-45 129.87,106.79 R49.2
N$60
  Top 0.33: Q6.1 125.18,68.1 arc-45 126.98,68.84 129.53,68.84 arc-45 131.33,68.1 R42.2
N$61  (1 unrouted)
  Top 0.33: Q6.6 R42.1 arc90 138,68.86 138,72.77 arc-90 VT1.24
N$63
  Top 0.33: U2.6 U2.2 arc-90 159.15,105.35 169.5,105.35 arc-90 R33*.1
N$65
  Top 0.33: Q6.5 arc-45 129.87,61.22 R43.2
NUTUBE_L
  Top 0.33: U2.3 154.22,103.16 arc45 153.56,104.75 147.9,110.41 arc-45 147.24,112.01 R18.1 147.24,117.17 arc-90 147.89,117.81 arc180 147.89,118.75 146.58,118.75 arc-180 146.58,119.69 147.89,119.69 arc180 147.89,120.62 146.59,120.62 arc-180 146.59,121.56 arc90 147.24,122.21 147.24,124.53 arc45 C93*.2
NUTUBE_R
  Top 0.33: U3.3 arc45 R22.2 147.24,50.91 arc-45 C92*.2
PDN
  Top 0.33: 20.82,84.16 arc90 7.72,71.07 7.72,57.25 arc-45 5.37,51.59 arc45 U$1.0
RED  (via drill 0.35)
  Top 0.33: v67.85,83.72 R1.2
  Route2 0.33: v67.85,83.72 arc45 66,79.25 66,68.05 arc-45 65.26,66.26 45.67,46.67 arc-45 34.39,42 25.2,42 arc-90 U$1.6
SCL
  Top 0.33: 21.43,81.44 arc45 19.15,75.92 U$1.19/A5
SDA
  Top 0.33: 25.5,80.22 arc90 21.69,76.41 U$1.18/A4
SDATA
  Bottom 0.33: 39.67,69.58 arc90 I2SOVERUSB.H3.13
SWITCH
  Top 0.33: R4.1 arc45 74.34,87.72 SW1.3
  Route2 0.33: U$1.5 arc-45 31.94,54.41 34.39,54.41 arc45 43.05,57.99 49.11,64.05 arc45 52.27,71.68 52.27,75.12 arc-45 56.43,85.16 64.65,93.38 arc-45 68.25,94.87 75.65,94.87 arc-90 78.59,91.93 78.59,90.26 arc-90 76.06,87.72 SW1.3
VCC
  pour Bottom (no thermals): 6.91,13.69 188.47,13.69 188.47,25.93 139.91,25.93 139.91,105.28 122.68,105.28 122.68,25.93 69.2,25.93 69.2,56.86 80,56.86 80,62 57.54,62 57.54,36.79 45.67,36.79 45.67,25.93 6.91,25.93

## Text on the board
Document: L | R